# Altium PCB ALTAIR_PD_Sergeant_V26.2b_Reference.PcbDoc (part 1 of 4)
Units mm, origin at the board's own origin, x right, y up, seen from the top; angles counter-clockwise.
Board outline 74 x 56 mm, 4 copper layers (Top Layer, Layer 1, Layer 2, Bottom Layer), stack 1.675 mm thick; 187 components, 116 nets, 602 pads, 425 vias.
Unrouted connection lines stored in the file: 4.
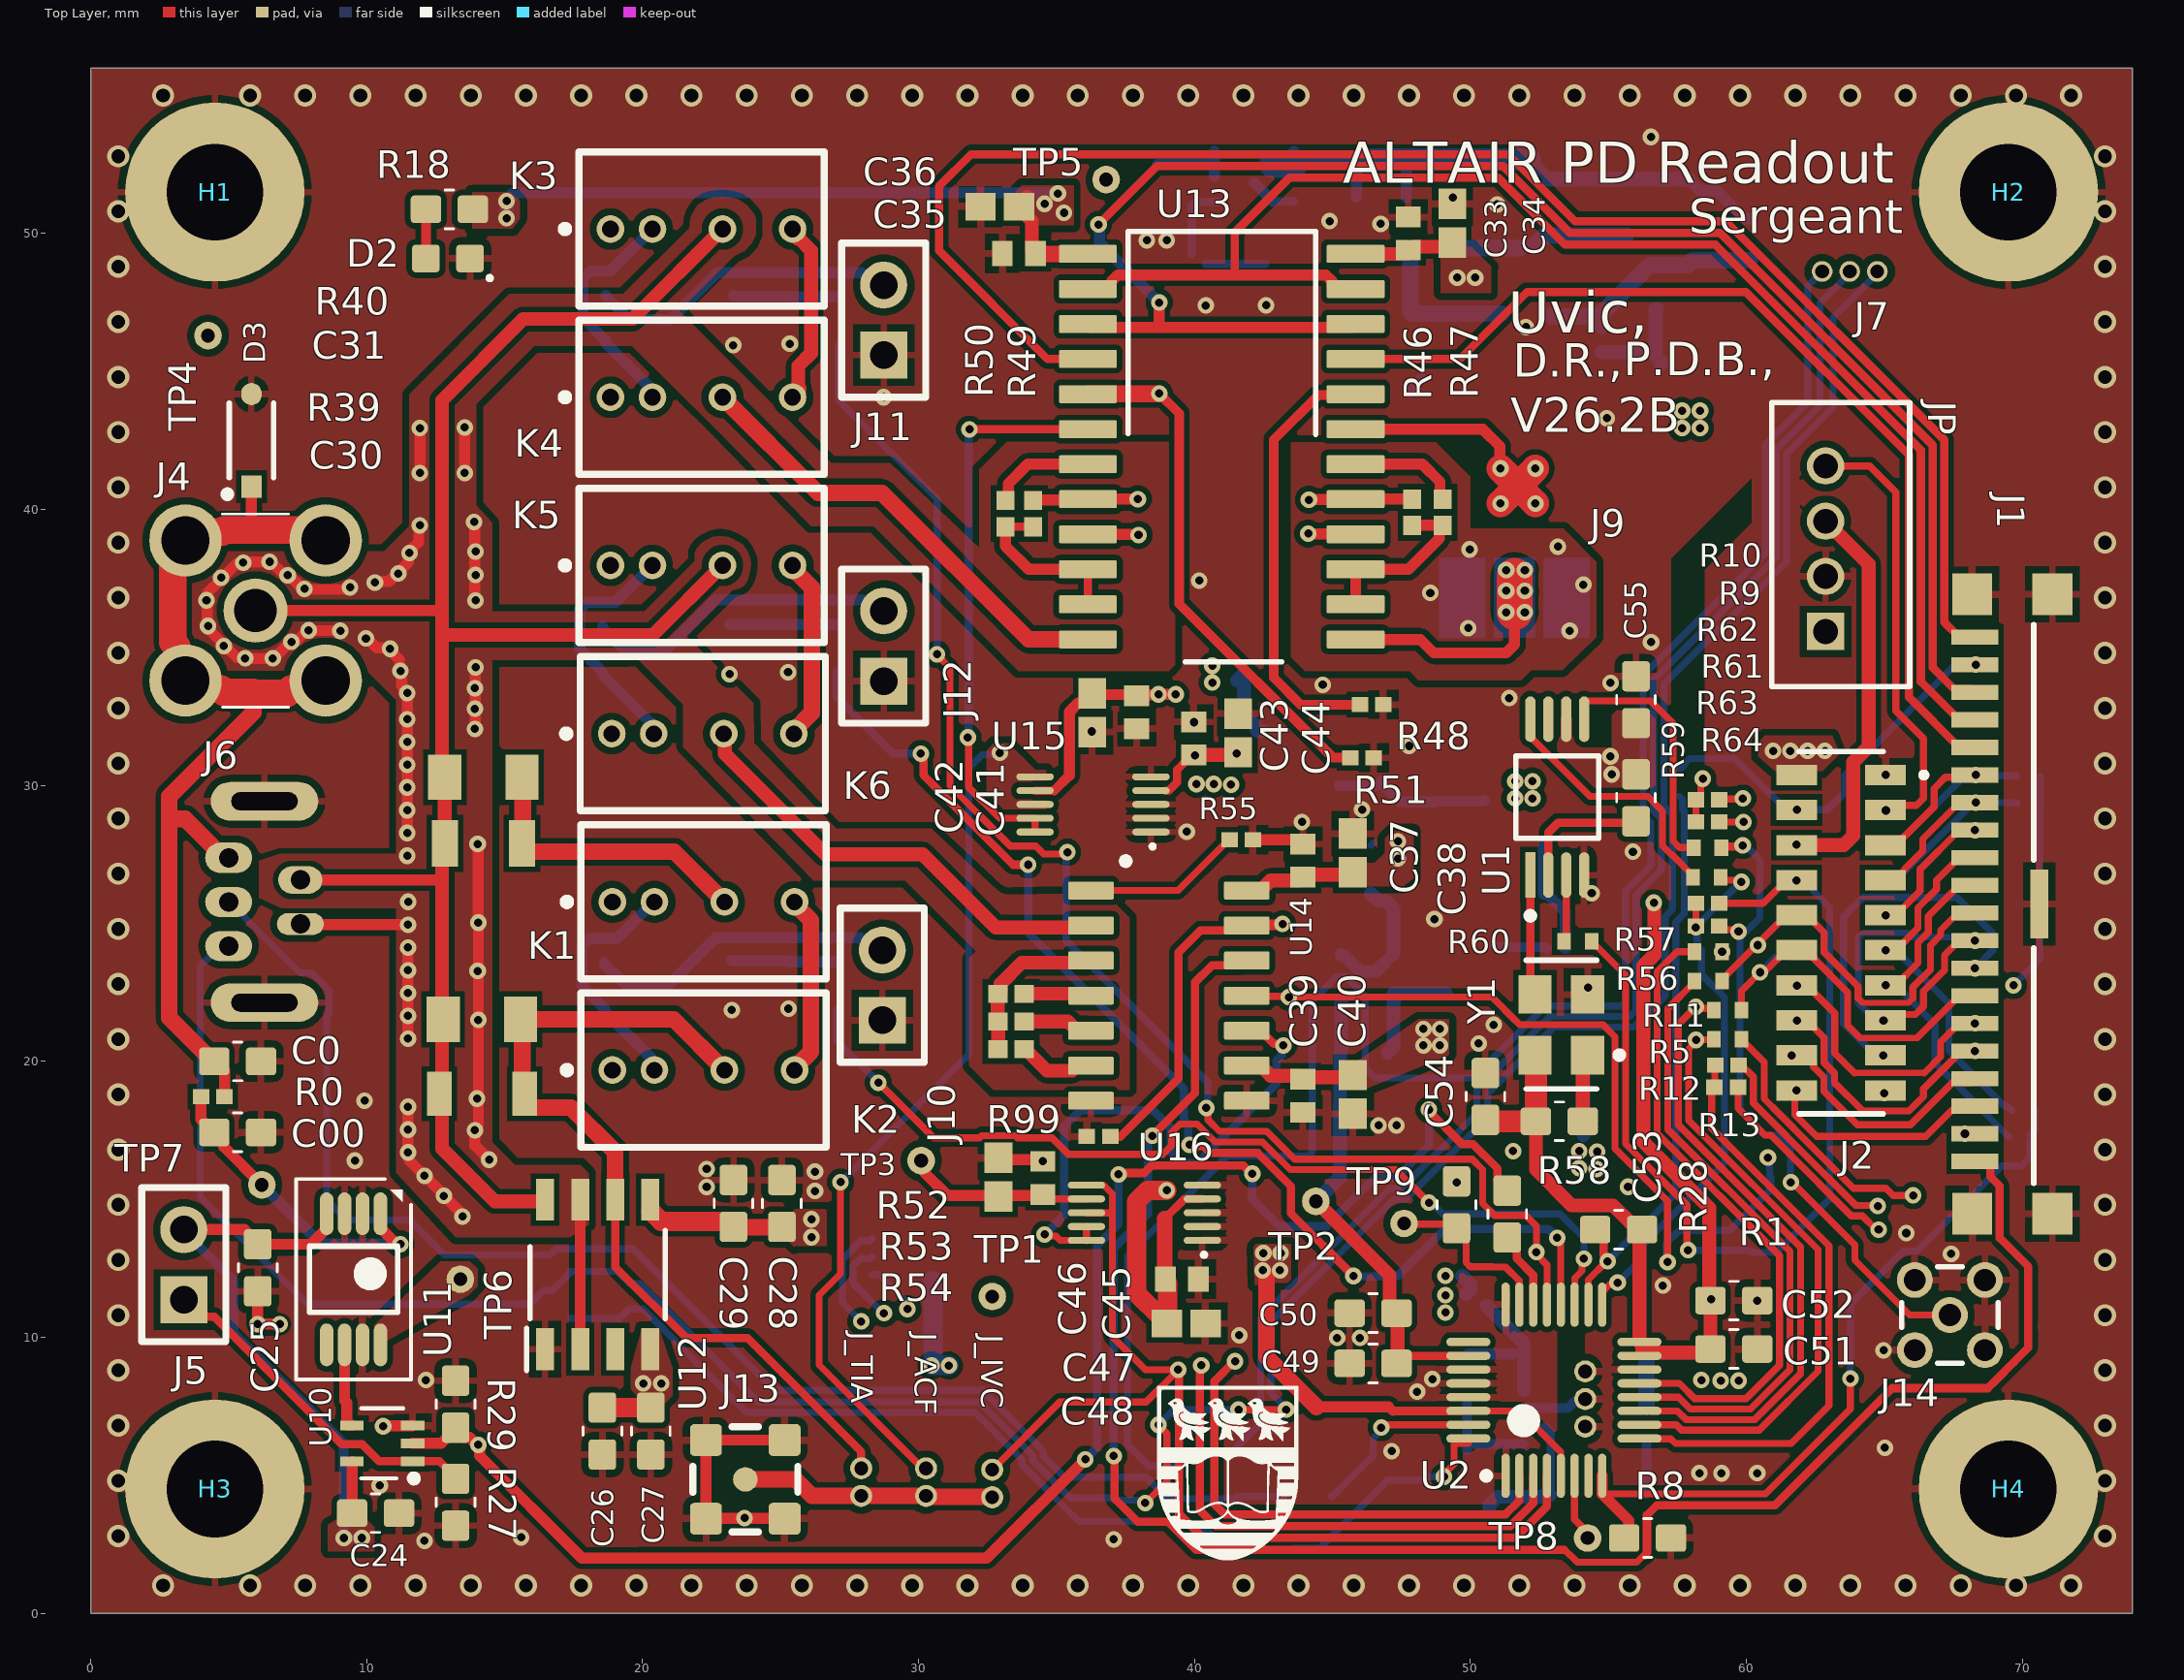
[diagram p0: Top Layer view]
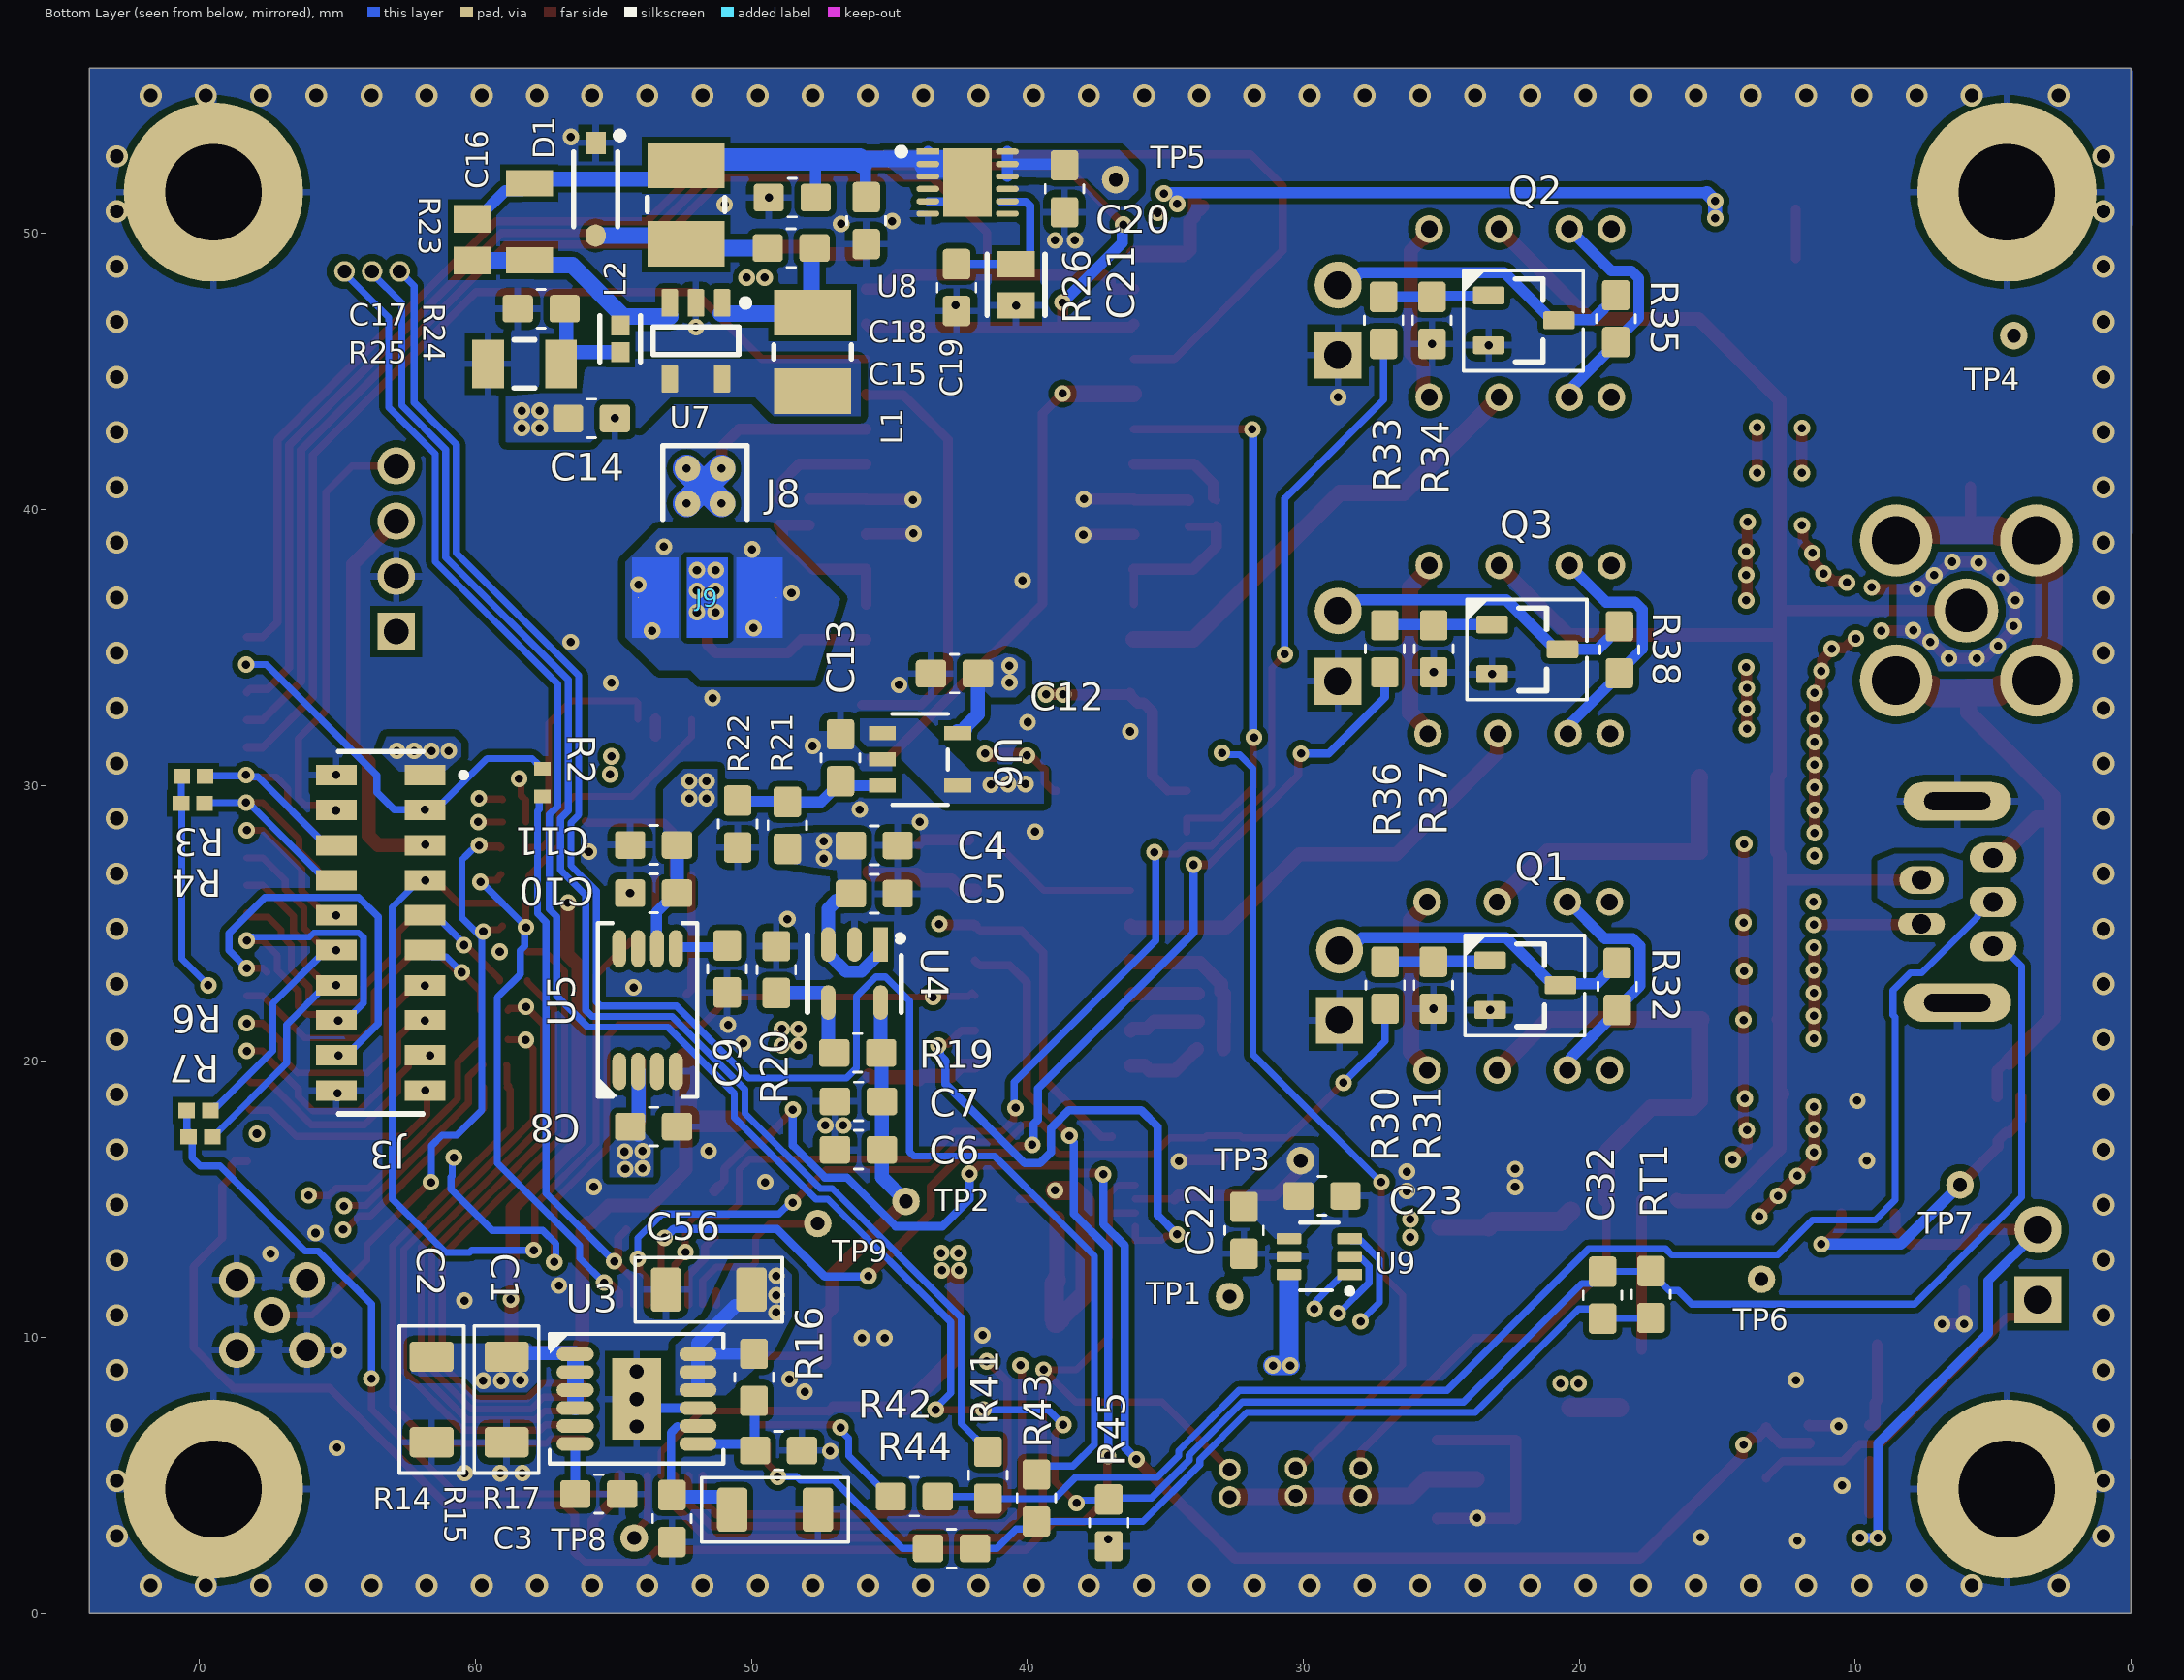
[diagram p1: Bottom Layer view, seen from below]
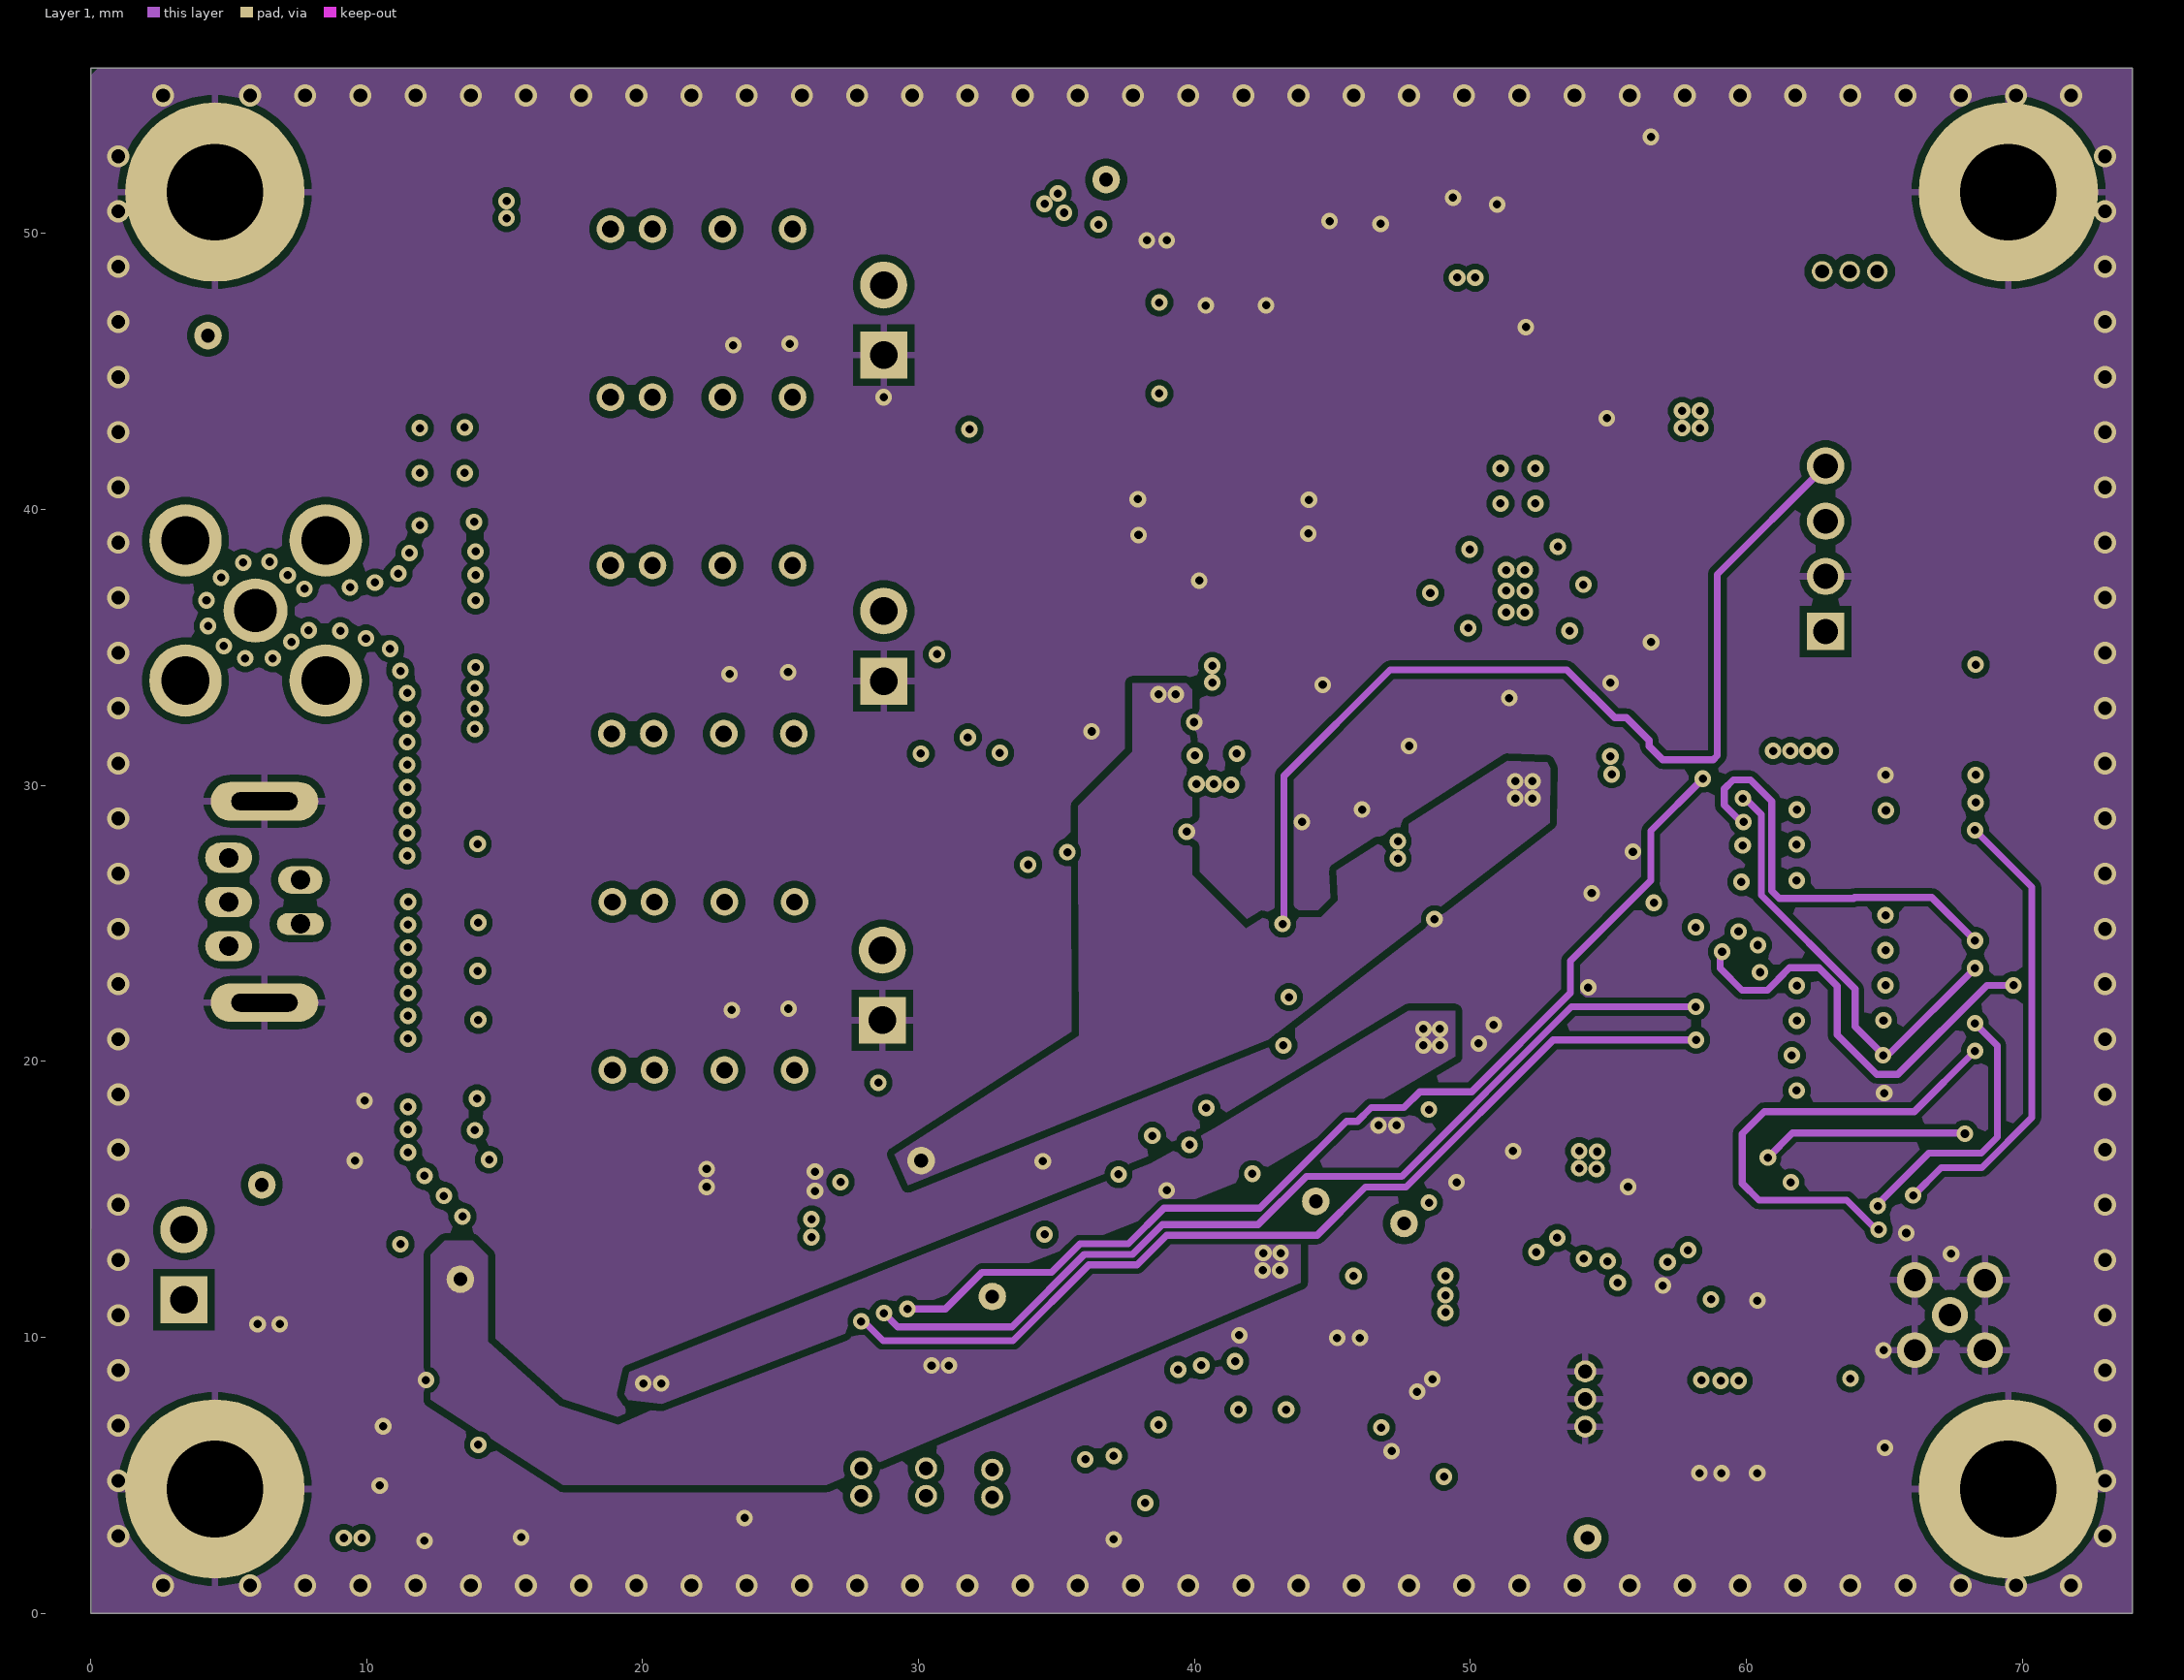
[diagram p2: Layer 1]
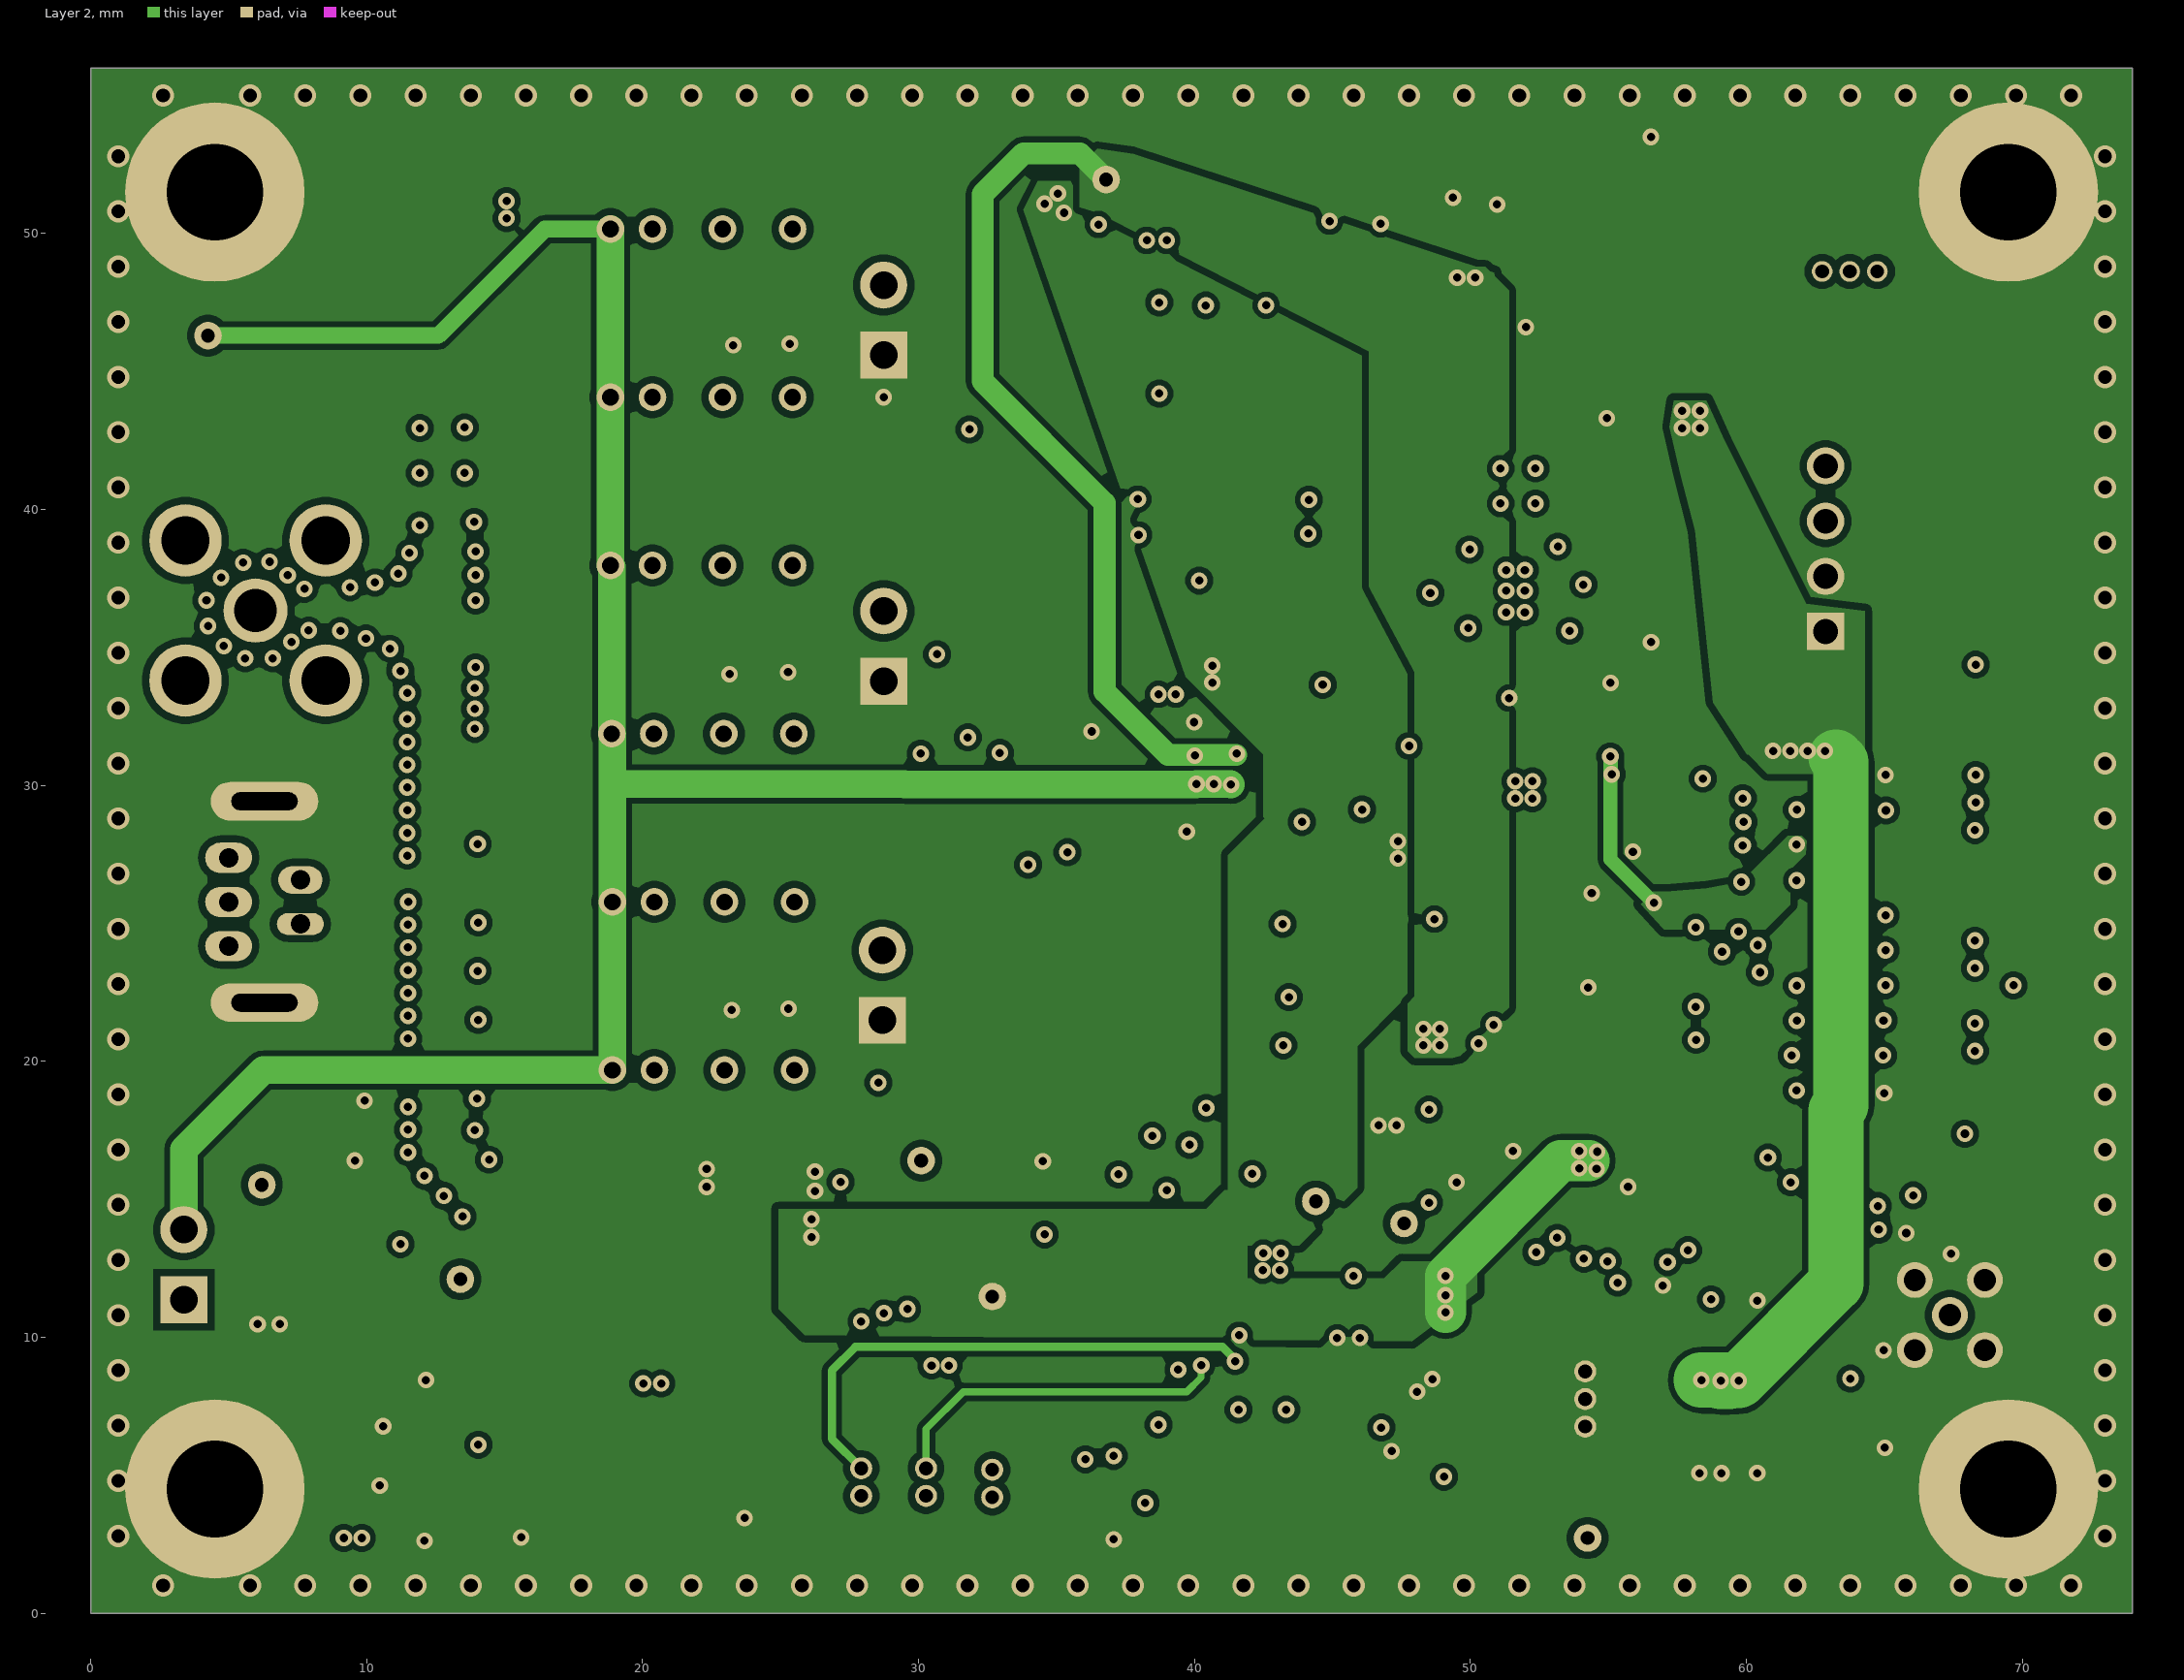
[diagram p3: Layer 2]
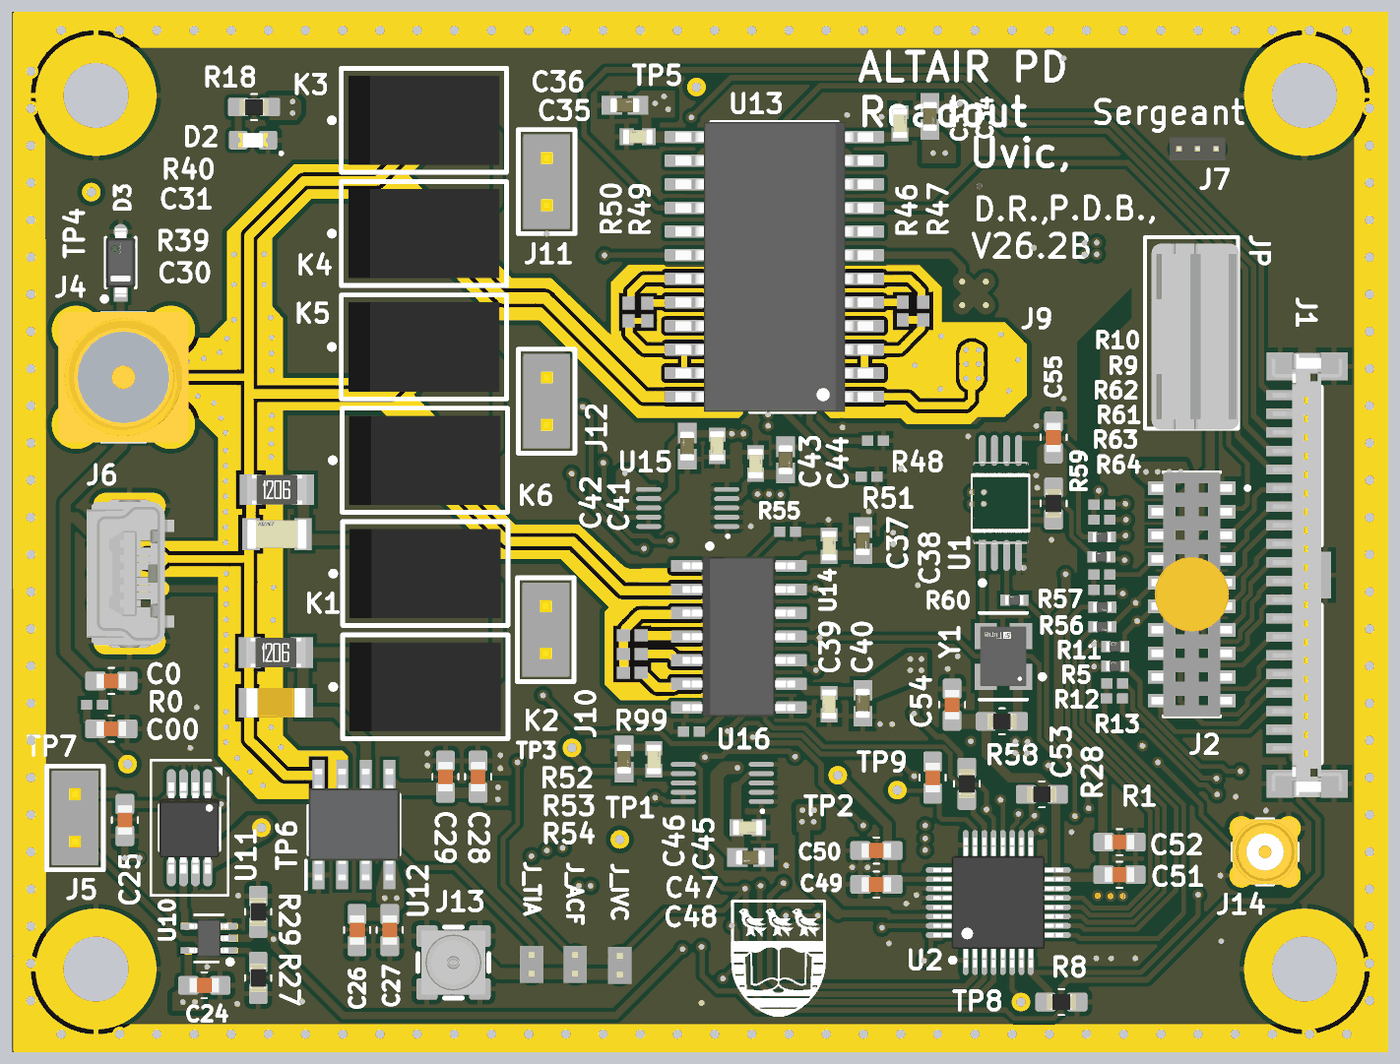
[diagram p6: 3D render of the assembled board from above, using the file's embedded part models]
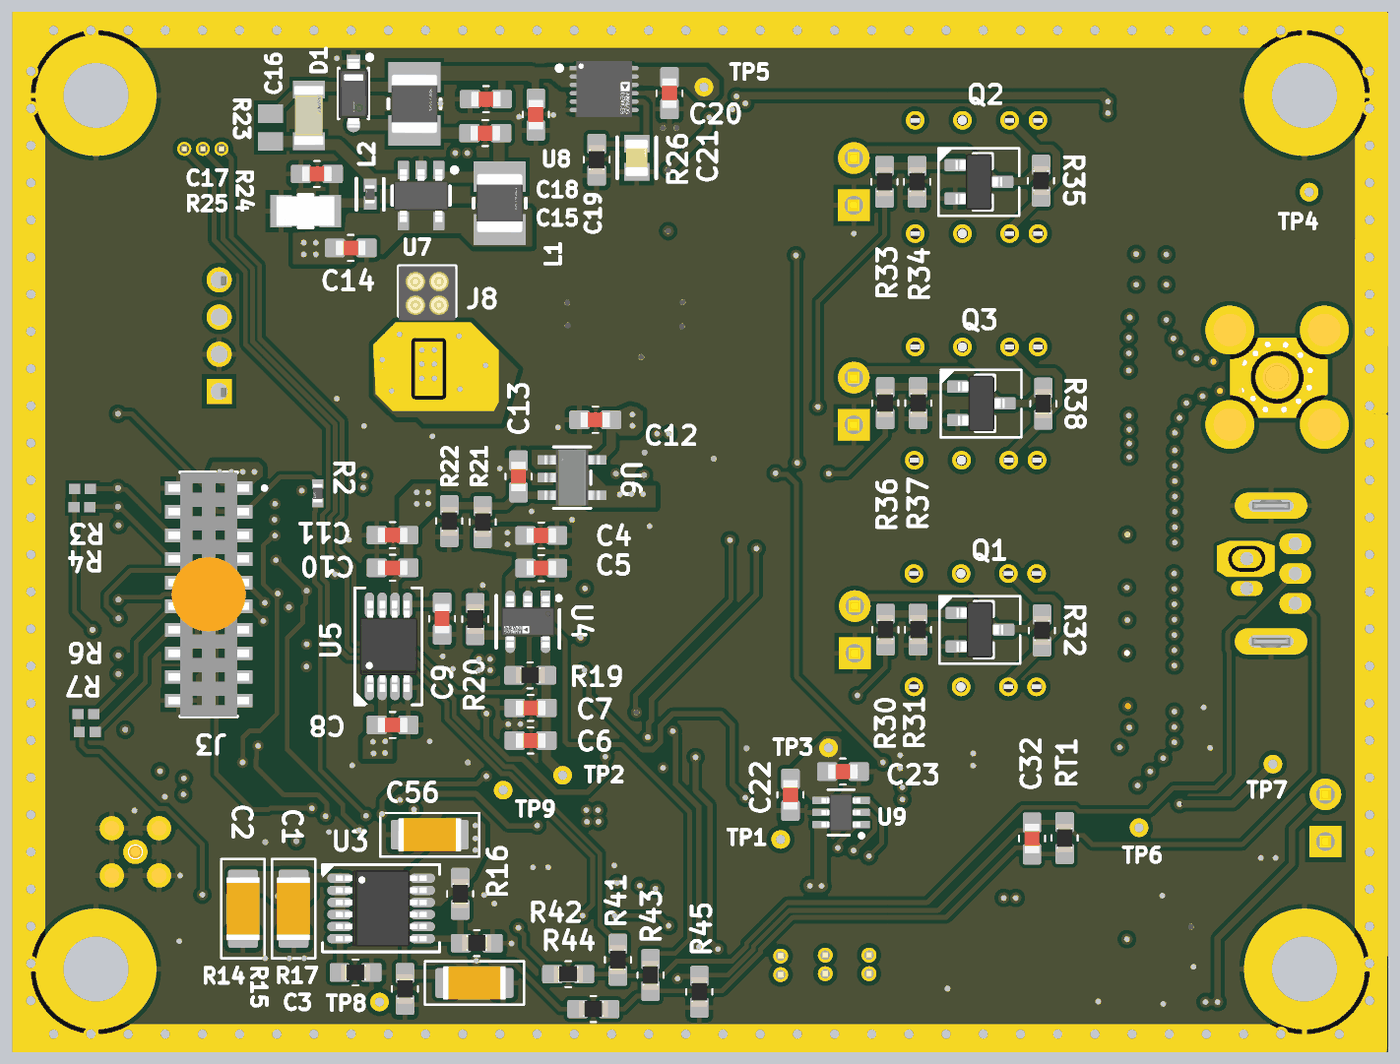
[diagram p7: 3D render of the assembled board from below, using the file's embedded part models]

## Layer stack, top to bottom
Top Solder: solder mask 0.0254, Solder Resist, Dk 3.5
Top Layer: signal copper 0.0356
Dielectric 2: prepreg 0.1702, FR-408, Dk 4.1
Layer 1: signal copper 0.035
Dielectric 1: core 1.1938, FR-408, Dk 4.8
Layer 2: signal copper 0.035
Dielectric 3: prepreg 0.1702, FR-408, Dk 4.1
Bottom Layer: signal copper 0.0356
Bottom Solder: solder mask 0.0254, Solder Resist, Dk 3.5

## Board outline
0,0 74,0 74,56 0,56

## Design rules (kind name [scope] priority, off if disabled: settings)
AssemblyTestPointUsage [All] p1: isadvanced=TRUE
AssemblyTestpoint [All] p1: isadvanced=TRUE testpointundercomponent=TRUE minsize=1.016 maxsize=2.54 preferedsize=1.524 minholesize=0 maxholesize=1.016 preferedholesize=0.813 testpointgrid=0.025 usegrid=TRUE gridtolerance=0 allowsidetop=TRUE allowsidebottom=TRUE
Clearance SoldierGuard [InNamedPolygon('SOLDIER_GUARD_L01_P001')] p1 off: isadvanced=TRUE gap=0.19 ignorepadtopadclearanceinfootprint=FALSE
Clearance UsbGuard [InNamedPolygon('GUARD_L01_P001') or InNamedPolygon('GUARD_L04_P001') or InNamedPolygon('GUARD_LBS_P001')] p2: isadvanced=TRUE gap=0.2 ignorepadtopadclearanceinfootprint=FALSE
Clearance Clearance_3 [InNamedPolygon('SYS_DVDD_L01_P001') or InNamedPolygon('SYS_DVDD_L03_P001')] p3 off: isadvanced=TRUE gap=0.25 ignorepadtopadclearanceinfootprint=FALSE
Clearance Clearance_1 [(ExistsOnLayer('Layer 1') Or ExistsOnLayer('Layer 2')) vs (ExistsOnLayer('Layer 1') Or ExistsOnLayer('Layer 2'))] p4: gap=0.2 ignorepadtopadclearanceinfootprint=TRUE except(0: Arc-Hole Track-Hole SMDPad-Hole THPad-Hole Via-Hole Fill-Hole Poly-Hole Region-Hole Text-Hole; 0.127: Arc-Arc Arc-Track Arc-SMDPad Arc-Text Track-Track Track-SMDPad Track-Text SMDPad-SMDPad SMDPad-Text Text-Text; 0.22: Arc-Via Track-Via Via-Text; 0.254: Arc-THPad Track-THPad SMDPad-THPad SMDPad-Via THPad-THPad THPad-Via THPad-Fill THPad-Poly THPad-Region THPad-Text Via-Via Fill-Fill Fill-Poly Fill-Region Poly-Poly Poly-Region Region-Region Hole-Hole) sourcerule=48 cellrowname=All cellrowtype=0 cellcolname=All cellcoltype=0 innerlayers=TRUE
Clearance Clearance_2 [(ExistsOnLayer('Top Layer') Or ExistsOnLayer('Bottom Layer')) vs (ExistsOnLayer('Top Layer') Or ExistsOnLayer('Bottom Layer'))] p5: gap=0.2 ignorepadtopadclearanceinfootprint=TRUE except(0: Arc-Hole Track-Hole SMDPad-Hole THPad-Hole Via-Hole Fill-Hole Poly-Hole Region-Hole Text-Hole; 0.127: Arc-Arc Arc-Track Arc-SMDPad Arc-Text Track-Track Track-SMDPad Track-Text SMDPad-SMDPad SMDPad-Text Text-Text; 0.22: Arc-Via Track-Via Via-Text; 0.254: Arc-THPad Track-THPad SMDPad-THPad SMDPad-Via THPad-THPad THPad-Via THPad-Fill THPad-Poly THPad-Region THPad-Text Via-Via Fill-Fill Fill-Poly Fill-Region Poly-Poly Poly-Region Region-Region Hole-Hole) sourcerule=48 cellrowname=All cellrowtype=0 cellcolname=All cellcoltype=0 outerlayers=TRUE
Clearance [All] p6: gap=0.254 ignorepadtopadclearanceinfootprint=TRUE ismatrix=TRUE
ComponentClearance [All] p1: isadvanced=TRUE gap=0.254 collisioncheckmode=3 verticalgap=0.254 showdistances=FALSE
FabricationTestPointUsage [All] p1: isadvanced=TRUE valid=0 allowmultiple=FALSE
FabricationTestpoint [All] p1: isadvanced=TRUE side=3 testpointundercomponent=TRUE minsize=1.016 maxsize=2.54 preferedsize=1.524 minholesize=0 maxholesize=1.016 preferedholesize=0.813 testpointgrid=0.025 allowsidetop=TRUE allowsidebottom=TRUE usegrid=TRUE gridtolerance=0
FanoutControl Fanout_BGA [IsBGA] p1: isadvanced=TRUE bgadir=Out bgaviamode=Centered fanoutstyle=Auto fanoutdirection=Alternating viagrid=0.025 // Fanout_BGA (Default Rule)
FanoutControl Fanout_LCC [IsLCC] p2: isadvanced=TRUE bgadir=Out bgaviamode=Centered fanoutstyle=Auto fanoutdirection=Alternating viagrid=0.025 // Fanout_LCC (Default Rule)
FanoutControl Fanout_SOIC [IsSOIC] p3: isadvanced=TRUE bgadir=Out bgaviamode=Centered fanoutstyle=Auto fanoutdirection=Alternating viagrid=0.025 // Fanout_SOIC (Default Rule)
FanoutControl Fanout_Small [(CompPinCount < 5)] p4: isadvanced=TRUE bgadir=Out bgaviamode=Centered fanoutstyle=Auto fanoutdirection=OutThenIn viagrid=0.025 // Fanout_Small (Default Rule)
FanoutControl Fanout_Default [All] p5: isadvanced=TRUE bgadir=Out bgaviamode=Centered fanoutstyle=Auto fanoutdirection=Alternating viagrid=0.025 // Fanout_Default (Default Rule)
Height [All] p1: isadvanced=TRUE minheight=0 maxheight=25.4 prefheight=12.7
HoleSize [All] p1: isadvanced=TRUE absolutevalues=TRUE maxlimit=4 minlimit=0.025 maxpercent=80.000 minpercent=20.000
HoleToHoleClearance [All] p1: isadvanced=TRUE gap=0.254 allowstackedmicrovias=TRUE
LayerPairs [All] p1: isadvanced=TRUE enforce=TRUE
MinimumSolderMaskSliver [All] p1: isadvanced=TRUE minsoldermaskwidth=0.076 // From PCBWay Advanced Capabilities
NetAntennae [All] p1: isadvanced=TRUE netantennaetolerance=0
PasteMaskExpansion [All] p1: isadvanced=TRUE expansion=0
PlaneClearance [All] p1: isadvanced=TRUE clearance=0.508
PlaneConnect [All] p1: isadvanced=TRUE planeconnectstyle=Relief reliefexpansion=0.508 reliefentries=4 reliefconductorwidth=0.254 reliefairgap=0.254
PolygonConnect PolygonConnectStyle_DCV [InPolygonClass('DirectConnectVias')] p1: isadvanced=TRUE thpad.connectstyle=Relief thpad.reliefconductorwidth=0.254 thpad.reliefentries=4 thpad.polygonreliefangle="90 Angle" thpad.airgapwidth=0.254 smdpad.connectstyle=Relief smdpad.reliefconductorwidth=0.254 smdpad.reliefentries=4 smdpad.polygonreliefangle="90 Angle" smdpad.airgapwidth=0.254 via.connectstyle=Direct via.reliefconductorwidth=0.254 via.reliefentries=2 via.polygonreliefangle="0 Angle" via.airgapwidth=0.254
PolygonConnect PolygonConnectStyle_DCE [InPolygonClass('DirectConnectEverything')] p2: isadvanced=TRUE connectstyle=Direct reliefconductorwidth=0.254 reliefentries=2 polygonreliefangle="0 Angle" airgapwidth=0.254
PolygonConnect [All] p3: connectstyle=Relief reliefconductorwidth=0.254 reliefentries=4 polygonreliefangle="90 Angle" airgapwidth=0.254
RoutingCorners [All] p1: isadvanced=TRUE cornerstyle=45-Degree minsetback=2.54 maxsetback=2.54
RoutingPriority [All] p1: isadvanced=TRUE routingpriority=0
RoutingVias RoutingViaStyle_3 [All] p1: isadvanced=TRUE holewidth=0.3 width=0.6 viastyle="Through Hole" minholewidth=0.3 minwidth=0.6 maxholewidth=0.711 maxwidth=1.27
RoutingVias [All] p2: holewidth=0.711 width=1.27 viastyle="Through Hole" minholewidth=0.711 minwidth=1.27 maxholewidth=0.711 maxwidth=1.27
ShortCircuit [All] p1: isadvanced=TRUE allowed=FALSE
SilkToSilkClearance [All] p1: isadvanced=TRUE silktosilkclearance=0.254
SilkToSolderMaskClearance [IsPad or IsPoly] p1: isadvanced=TRUE minsilkscreentomaskgap=0.15 clearancetoexposedcopper=TRUE
SolderMaskExpansion [All] p1: isadvanced=TRUE expansion=0 istentingtop=FALSE
SupplyNets "Schematic Supply Nets_5" [InNet('A5V')] p1: isadvanced=TRUE voltage=0.000
SupplyNets "Schematic Supply Nets_4" [InNet('-15V')] p2: isadvanced=TRUE voltage=0.000
SupplyNets "Schematic Supply Nets_3" [InNet('SYS_DVDD')] p3: isadvanced=TRUE voltage=0.000
SupplyNets "Schematic Supply Nets_2" [InNet('SYS_GND')] p4: isadvanced=TRUE voltage=0.000
SupplyNets "Schematic Supply Nets_1" [InNet('A5VSW')] p5: isadvanced=TRUE voltage=0.000
SupplyNets "Schematic Supply Nets" [InNet('7V5')] p6: isadvanced=TRUE voltage=0.000
UnRoutedNet [All] p1: isadvanced=TRUE
UnpouredPolygon [All] p1: isadvanced=TRUE
Width [All] p1: maxlimit=5 minlimit=0.127 preferedwidth=0.254 midlayer1_minwidth=0.254 midlayer2_minwidth=0.254 minimp=50.000000 maximp=50.000000 favimp=50.000000
4 further rules are at their usual default settings.

## Classes and differential pairs
polygon class DirectConnectVias: SYS_GND_L01_P001 SYS_GND_L01_P002 SYS_GND_L02_P001 SYS_GND_L04_P001
polygon class DirectConnectEverything: 7V5_L01_P001 7V5_L01_P002 7V5_L01_P003 7V5_L01_P004 7V5_L03_P001 7V5_L03_P002 7V5_L04_P001 7V5_L04_P002 7V5_L04_P003 7V5_L04_P004 -15V_L01_P001 -15V_L01_P002 -15V_L01_P003 -15V_L02_P001 -15V_L03_P001 -15V_L03_P002 -15V_L04_P001 -16V5_L04_P001 A5V_L02_P001 A5V_L04_P001 A5V_L04_P002 A5VSW_L01_P001 A5VSW_L04_P001 GUARD_L01_P001 GUARD_L01_P002 GUARD_L01_P003 GUARD_L01_P004 GUARD_L04_P001 GUARD_L04_P002 NetJ_ACF_1_L01_P001 SOLDIER_GUARD_L01_P001 SOLDIER_GUARD_L04_P001 SYS_DVDD_L01_P001 SYS_DVDD_L03_P001 SYS_GND_L03_P001 SYS_GND_L04_P002 SYS_VBAT_L01_P001 SYS_VBAT_L03_P001 SYS_VBAT_L04_P001 SYS_VBAT_L04_P002 SYS_VBAT_L04_P003 VBIAS_L01_P001 VBIAS_L01_P002 VBIAS_L02_P001
component class TIA1: C0 C00 C22 C23 C24 C25 C26 C27 C28 C29 C30 C31 C32 D3 J4 J5 J6 J7 J10 J11 J12 K1 K2 K3 K4 K5 K6 Q1 Q2 Q3 R0 R27 R28 R29 R30 R31 R32 R33 R34 R35 R36 R37 R38 R39 R40 R41 R42 R43 R44 R45 RT1 TP6 TP7 U9 U10 U11 U12
component class PWR1: C1 C2 C3 C4 C5 C6 C7 C8 C9 C10 C11 C12 C13 C14 C15 C16 C17 C18 C19 C20 C21 C56 D1 D2 L1 L2 R14 R15 R16 R17 R18 R19 R20 R21 R22 R23 R24 R25 R26 TP1 TP2 TP3 TP4 TP5 U3 U4 U5 U6 U7 U8
component class INT1: C33 C34 C35 C36 C37 C38 C39 C40 J8 J9 R46 R47 R48 R49 R50 R51 R52 R53 R54 R55 R99 U13 U14
component class BIO1: H1 H2 H3 H4 J1 J2 J3 JP R1 R2 R3 R4 R5 R6 R7 R8 R9 R10 R11 R12 R13
component class ADC1: C41 C42 C43 C44 C45 C46 C47 C48 C49 C50 C51 C52 C53 C54 C55 J13 J14 J_ACF J_IVC J_TIA R56 R57 R58 R59 R60 R61 R62 R63 R64 TP8 TP9 U1 U2 U15 U16 Y1

## Components (designator, comment, footprint, x,y, rotation, side; value= is the part's Value field where it differs from the comment)
C00 "TBD OPT" "CAP 0603 IPC MID DENSITY" 5.325,17.425 r180 top
C0 "TBD OPT" "CAP 0603 IPC MID DENSITY" 5.325,20 r180 top
C1 "10uF" "CAP 1206 IPC LOW DENSITY" 58.875,7.747 r90 bottom
C2 "10uF" "CAP 1206 IPC LOW DENSITY" 61.593,7.747 r90 bottom
C3 "10uF" "CAP 1206 IPC LOW DENSITY" 49.147,3.75 r0 bottom
C4 "1uF" "CAP 0603 IPC MID DENSITY" 45.55,27.826 r0 bottom
C5 "1uF" "CAP 0603 IPC MID DENSITY" 45.55,26.072 r0 bottom
C6 "1uF" "CAP 0603 IPC MID DENSITY" 46.125,16.794 r180 bottom
C7 "1uF" "CAP 0603 IPC MID DENSITY" 46.125,18.548 r180 bottom
C8 "1uF" "CAP 0603 IPC MID DENSITY" 53.55,17.632 r0 bottom
C9 "1uF" "CAP 0603 IPC MID DENSITY" 50.883,23.35 r90 bottom
C10 "10uF" "CAP 0603 IPC MID DENSITY" 53.55,26.09 r180 bottom
C11 "1uF" "CAP 0603 IPC MID DENSITY" 53.55,27.844 r180 bottom
C12 "1uF" "CAP 0603 IPC MID DENSITY" 42.645,34.05 r180 bottom
C13 "0.1uF" "CAP 0603 IPC MID DENSITY" 46.775,31 r270 bottom
C14 "10uF" "CAP 0603 IPC MID DENSITY" 55.8,43.296 r0 bottom
C15 "1uF" "CAP 0603 IPC MID DENSITY" 48.564,49.475 r0 bottom
C16 "330pF" "CAP 1206 NON-IPC KEMET NP0" 58.05,50.425 r270 bottom
C17 "1uF DNP" "CAP 0603 IPC MID DENSITY" 57.621,47.275 r0 bottom
C18 "10uF" "CAP 0603 IPC MID DENSITY" 48.525,51.3 r0 bottom
C19 "10uF" "CAP 0603 IPC MID DENSITY" 45.844,50.467 r270 bottom
C20 "10uF" "CAP 0603 IPC MID DENSITY" 38.656,51.621 r270 bottom
C21 "4.7uF" "CAP 0805 NON-IPC KEMET X5R" 40.415,48.142 r270 bottom
C22 "0.1uF" "CAP 0603 IPC MID DENSITY" 32.15,13.875 r90 bottom
C23 "10uF" "CAP 0603 IPC MID DENSITY" 29.325,15.125 r0 bottom
C24 "0.1uF" "CAP 0603 IPC MID DENSITY" 10.325,3.625 r180 top
C25 "1uF" "CAP 0603 IPC MID DENSITY" 6.055,12.519 r90 top
C26 "1uF" "CAP 0603 IPC MID DENSITY" 18.546,6.6 r90 top
C27 "0.1uF" "CAP 0603 IPC MID DENSITY" 20.3,6.6 r90 top
C28 "1uF" "CAP 0603 IPC MID DENSITY" 25.05,14.85 r270 top
C29 "0.1uF" "CAP 0603 IPC MID DENSITY" 23.296,14.85 r270 top
C30 "10pF" "CAP 1206 UNKNOWN" 14.182,18.826 r0 top
C31 "300pF" "CAP 1206 NON-IPC KEMET NP0" 14.232,27.896 r0 top
C32 "0.1uF" "CAP 0603 IPC MID DENSITY" 19.154,11.525 r270 bottom
C33 "0.1uF" "CAP 0603 NON-IPC KEMET X7R" 47.748,50 r270 top
C34 "10uF" "CAP 0603 IPC MID DENSITY MURATA" 49.355,50.375 r270 top
C35 "0.1uF" "CAP 0603 NON-IPC KEMET X7R" 33.639,49.275 r0 top
C36 "10uF" "CAP 0603 IPC MID DENSITY MURATA" 32.95,50.975 r0 top
C37 "0.1uF" "CAP 0603 NON-IPC KEMET X7R" 43.932,27.275 r270 top
C38 "10uF" "CAP 0603 IPC MID DENSITY MURATA" 45.74,27.55 r270 top
C39 "0.1uF" "CAP 0603 NON-IPC KEMET X7R" 43.932,18.75 r90 top
C40 "10uF" "CAP 0603 IPC MID DENSITY MURATA" 45.74,18.8 r90 top
C41 "0.1uF" "CAP 0603 NON-IPC KEMET X7R" 37.907,32.65 r90 top
C42 "10uF" "CAP 0603 IPC MID DENSITY MURATA" 36.3,32.632 r90 top
C43 "0.1uF" "CAP 0603 NON-IPC KEMET X7R" 39.979,31.7 r270 top
C44 "10uF" "CAP 0603 IPC MID DENSITY MURATA" 41.587,31.9 r270 top
C45 "0.1uF" "CAP 0603 NON-IPC KEMET X7R" 34.507,15.775 r270 top
C46 "10uF" "CAP 0603 IPC MID DENSITY MURATA" 32.9,15.8 r270 top
C47 "0.1uF" "CAP 0603 NON-IPC KEMET X7R" 39.55,12.107 r180 top
C48 "10uF" "CAP 0603 IPC MID DENSITY MURATA" 39.7,10.5 r180 top
C49 "0.1uF" "CAP 0603 IPC MID DENSITY" 46.475,9.05 r0 top
C50 "10uF" "CAP 0603 IPC MID DENSITY" 46.475,10.875 r0 top
C51 "0.1uF" "CAP 0603 IPC MID DENSITY" 59.55,9.575 r180 top
C52 "10uF" "CAP 0603 IPC MID DENSITY" 59.55,11.329 r180 top
C53 "10uF" "CAP 0603 IPC MID DENSITY" 49.5,14.8 r270 top
C54 "0.1uF" "CAP 0603 IPC MID DENSITY" 50.546,18.725 r270 top
C55 "0.1uF" "CAP 0603 IPC MID DENSITY" 56.004,33.104 r270 top
C56 "10uF" "CAP 1206 IPC LOW DENSITY" 51.55,11.725 r180 bottom
D1 "MBR0520" "SOD-123 ONSEMI SMALL PADS" 55.65,51.605 r270 bottom
D2 "BLUE" "LED 0603 MID DENSITY" 12.95,49.096 r0 top
D3 "MMSZ4679" "SOD-123 ONSEMI SMALL PADS" 5.825,42.5 r90 top
H1 "Mount-hole" "M3 PTH FOR 4.5MM HEX" 4.5,51.5 r0 top
H2 "Mount-hole" "M3 PTH FOR 4.5MM HEX" 69.5,51.5 r0 top
H3 "Mount-hole" "M3 PTH FOR 4.5MM HEX" 4.5,4.5 r0 top
H4 "Mount-hole" "M3 PTH FOR 4.5MM HEX" 69.5,4.5 r0 top
J1 "DF19-20P-1V_52_" "HEADER MALE 20x1 1MM PITCH SMD" 69.641,25.7 r270 top
J2 "CLP-110-02-X-D" "HEADER FEMALE 10X2 1.27MM PITCH SMD" 63.437,24.66 r90 top
J3 "CLP-110-02-X-D" "HEADER FEMALE 10X2 1.27MM PITCH SMD" 63.437,24.66 r90 bottom
J4 "60312002114503" "COAX SMA THT" 5.975,36.336 r180 top
J5 "Jumper" "JUMPER 2POS 2.54MM PITCH THT" 3.375,11.36 r90 top
J6 "USB-miniB" USB-miniB 6.3,25.775 r90 top
J7 "BC020-03-A-0200-0300-L-G" "JUMPER 3POS 1MM PITCH THT" 63.75,48.625 r0 top
J8 "Pogo_pins" "POGO PINS 2x2 SMD 50mil pitch" 51.685,40.85 r270 bottom
J9 "Pogo_Pad" "POGO_PAD 3 x 1x2" 51.6,36.8 r0 top
J10 "Jumper" "JUMPER 2POS 2.54MM PITCH THT" 28.688,21.487 r90 top
J11 "Jumper" "JUMPER 2POS 2.54MM PITCH THT" 28.74,45.591 r90 top
J12 "Jumper" "JUMPER 2POS 2.54MM PITCH THT" 28.74,33.78 r90 top
J13 "MMCX" "COAX MMCX SMD" 23.725,4.85 r0 top
J14 "66012002111503" "COAX MMCX THT" 67.38,10.805 r270 top
J_ACF "J_TIA" "JUMPER 2POS 1MM PITCH THT" 30.275,5.25 r270 top
J_IVC "J_TIA" "JUMPER 2POS 1MM PITCH THT" 32.675,5.2 r270 top
J_TIA "J_TIA" "JUMPER 2POS 1MM PITCH THT" 27.925,5.25 r270 top
JP "440054-4" "HEADER MALE 4x1 2MM PITCH THT" 62.875,35.575 r270 top
K1 "118-A-5/2D" 118-A-5/2D 18.909,25.778 r0 top
K2 "118-A-5/2D" 118-A-5/2D 18.909,19.682 r0 top
K3 "118-A-5/2D" 118-A-5/2D 18.838,50.163 r0 top
K4 "118-A-5/2D" 118-A-5/2D 18.838,44.067 r0 top
K5 "118-A-5/2D" 118-A-5/2D 18.838,37.971 r0 top
K6 "118-A-5/2D" 118-A-5/2D 18.885,31.874 r0 top
L1 "10uH" "IND 1210 IPC LOW DENSITY" 47.784,45.707 r90 bottom
L2 "10uH" "IND 1210 IPC LOW DENSITY" 52.372,51.05 r90 bottom
Q1 "DMG2302UK" "SOT90-3 LOW DENSITY" 21.957,22.757 r180 bottom
Q2 "DMG2302UK" "SOT90-3 LOW DENSITY" 22.009,46.853 r180 bottom
Q3 "DMG2302UK" "SOT90-3 LOW DENSITY" 21.882,34.931 r180 bottom
R0 "TBD" "RES 0402 IPC MID DENSITY" 4.425,18.721 r0 top
R1 "10k" "RES 0603 IPC MID DENSITY" 55.375,13.9 r180 top
R2 "47R" "RES 0402 NON-IPC SEI" 57.575,30.1 r270 bottom
R3 "0R OPT" "RES 0402 IPC MID DENSITY" 70.225,30.325 r0 bottom
R4 "0R OPT" "RES 0402 IPC MID DENSITY" 70.25,29.35 r0 bottom
R5 "47R" "RES 0402 NON-IPC SEI" 59.325,20.796 r180 top
R6 "TBD OPT" "RES 0402 IPC MID DENSITY" 70.043,18.218 r0 bottom
R7 "TBD OPT" "RES 0402 IPC MID DENSITY" 69.971,17.257 r0 bottom
R8 "0R DNP" "RES 0603 IPC MID DENSITY" 56.425,2.725 r0 top
R9 "TBD OPT" "RES 0402 IPC MID DENSITY" 58.6,28.675 r180 top
R10 "TBD OPT" "RES 0402 IPC MID DENSITY" 58.6,29.479 r180 top
R11 "47R" "RES 0402 NON-IPC SEI" 59.325,21.85 r180 top
R12 "TBD OPT" "RES 0402 IPC MID DENSITY" 59.3,19.866 r180 top
R13 "TBD OPT" "RES 0402 IPC MID DENSITY" 59.275,19.062 r180 top
R14 "TBD" "RES 0603 IPC MID DENSITY" 55.536,4.318 r0 bottom
R15 "75k" "RES 0603 IPC MID DENSITY" 52.882,3.429 r90 bottom
R16 "150k" "RES 0603 IPC MID DENSITY" 49.909,8.548 r90 bottom
R17 "10k" "RES 0603 IPC MID DENSITY" 49.02,5.894 r0 bottom
R18 "330R" "RES 0603 IPC MID DENSITY" 13,50.875 r0 top
R19 "TBD" "RES 0603 IPC MID DENSITY" 46.15,20.302 r180 bottom
R20 "TBD" "RES 0603 IPC MID DENSITY" 49.1,23.325 r270 bottom
R21 "100k" "RES 0603 IPC MID DENSITY" 48.7,28.55 r270 bottom
R22 "200k" "RES 0603 IPC MID DENSITY" 50.5,28.6 r90 bottom
R23 "30k" "RES 0805 IPC HIGH DENSITY" 60.125,49.775 r90 bottom
R24 "1k" "RES 0402 IPC LOW DENSITY YAGEO" 54.757,46.182 r90 bottom
R25 "1.5k" "RES 1206 NON-IPC VISHAY" 58.225,45.275 r180 bottom
R26 "150k" "RES 0603 IPC MID DENSITY" 42.569,48.042 r270 bottom
R27 "100k" "RES 0603 IPC MID DENSITY" 13.225,4.021 r270 top
R28 "47R" "RES 0603 IPC MID DENSITY" 51.339,14.464 r270 top
R29 "100k" "RES 0603 IPC MID DENSITY" 13.225,7.575 r90 top
R30 "47R" "RES 0603 IPC MID DENSITY" 27.04,22.757 r270 bottom
R31 "100k" "RES 0603 IPC MID DENSITY" 25.286,22.757 r270 bottom
R32 "0R" "RES 0603 IPC MID DENSITY" 18.622,22.714 r270 bottom
R33 "47R" "RES 0603 IPC MID DENSITY" 27.092,46.853 r270 bottom
R34 "100k" "RES 0603 IPC MID DENSITY" 25.338,46.853 r270 bottom
R35 "0R" "RES 0603 IPC MID DENSITY" 18.672,46.914 r270 bottom
R36 "47R" "RES 0603 IPC MID DENSITY" 27.05,34.95 r270 bottom
R37 "100k" "RES 0603 IPC MID DENSITY" 25.275,34.95 r270 bottom
R38 "0R" "RES 0603 IPC MID DENSITY" 18.547,34.914 r270 bottom
R39 "1M" "RES 1206 IPC MID DENSITY" 14.175,21.525 r0 top
R40 "10k" "RES 1206 IPC MID DENSITY" 14.232,30.295 r0 top
R41 "0R OPT" "RES 0603 IPC MID DENSITY" 41.429,5 r90 bottom
R42 "0R OPT" "RES 0603 IPC MID DENSITY" 44.1,4.225 r180 bottom
R43 "0R OPT" "RES 0603 IPC MID DENSITY" 39.675,4.175 r90 bottom
R44 "0R OPT" "RES 0603 IPC MID DENSITY" 42.75,2.346 r180 bottom
R45 "0R" "RES 0603 IPC MID DENSITY" 37.05,3.275 r270 bottom
R46 "TBD DNP" "RES 0402 IPC LOW DENSITY" 47.9,39.9 r270 top
R47 "CAP DNP" "RES 0402 IPC LOW DENSITY" 49,39.9 r270 top
R48 "0R" "RES 0402 IPC MID DENSITY" 46.425,32.925 r0 top
R49 "TBD DNP" "RES 0402 IPC LOW DENSITY" 34.154,39.85 r270 top
R50 "CAP DNP" "RES 0402 IPC LOW DENSITY" 33.15,39.85 r270 top
R51 "0R" "RES 0402 IPC MID DENSITY" 46.075,31 r0 top
R52 "CAP OPT" "RES 0402 IPC LOW DENSITY" 33.35,22.45 r0 top
R53 "CAP OPT" "RES 0402 IPC LOW DENSITY" 33.35,21.446 r0 top
R54 "CAP OPT" "RES 0402 IPC LOW DENSITY" 33.35,20.441 r0 top
R55 "0R" "RES 0402 IPC MID DENSITY" 41.7,28.035 r0 top
R56 "47R" "RES 0402 NON-IPC SEI" 58.625,22.916 r0 top
R57 "47R" "RES 0402 NON-IPC SEI" 58.625,23.971 r0 top
R58 "10k" "RES 0603 IPC MID DENSITY" 53.225,17.825 r180 top
R59 "10k" "RES 0603 IPC MID DENSITY" 56.004,29.55 r90 top
R60 "33R" "RES 0402 NON-IPC YAGEO" 53.9,24.35 r180 top
R61 "33R" "RES 0402 NON-IPC YAGEO" 58.575,26.675 r180 top
R62 "33R" "RES 0402 NON-IPC YAGEO" 58.6,27.746 r180 top
R63 "0R A, C" "RES 0402 IPC MID DENSITY" 58.6,25.725 r0 top
R64 "0R A, B" "RES 0402 IPC MID DENSITY" 58.6,24.9 r180 top
R99 "0R" "RES 0402 IPC MID DENSITY" 36.525,17.275 r0 top
RT1 "NTC 0603 10K 1%" "RES 0603 IPC MID DENSITY" 17.4,11.55 r270 bottom value="NT 10K"
TP1 "Testpoint" "TESTPOINT THT" 32.675,11.475 r90 top
TP2 "Testpoint" "TESTPOINT THT" 44.4,14.925 r90 top
TP3 "Testpoint" "TESTPOINT THT" 30.1,16.4 r90 top
TP4 "Testpoint" "TESTPOINT THT" 4.25,46.3 r90 top
TP5 "Testpoint" "TESTPOINT THT" 36.8,51.95 r90 top
TP6 "Testpoint" "TESTPOINT THT" 13.4,12.105 r180 top
TP7 "Testpoint" "TESTPOINT THT" 6.2,15.525 r90 top
TP8 "Testpoint" "TESTPOINT THT" 54.25,2.725 r0 top
TP9 "Testpoint" "TESTPOINT THT" 47.6,14.125 r90 top
U1 "LMK1C1103PWR" "8-TSSOP 0.65MM PITCH 4.4MM WIDTH IPC MID DENSITY" 53.15,29.575 r90 top
U2 "ADS124S08IPBSR" "32TQFP 7X7MM IPC LOW DENSITY" 53.029,8.079 r90 top
U3 "LT3045" "12-TSOP 0.65MM PITCH 3MM WIDTH EP IPC MID DENSITY" 54.164,7.761 r180 bottom
U4 "ADP7142AUJZ-5.0-R7" "SOT23-5 HIGH DENSITY AD" 46.269,23.184 r270 bottom
U5 "REF5050" "8-TSOP 0.65MM PITCH 3MM WIDTH IPC MID DENSITY" 53.766,21.861 r90 bottom
U6 "OPA182" "SOT23-5 NON-IPC TI" 43.891,30.939 r180 bottom
U7 "LM2611AMF/NOPB" "SOT23-5 MID DENSITY" 52.016,46.11 r270 bottom
U8 "LT3094EDD#PBF" "12DFN 3x3MM EP IPC MID DENSITY" 42.169,51.842 r180 bottom
U9 "DAC5311" "SOT363-6 MID DENSITY" 29.425,12.925 r0 bottom
U10 "SN74LVC1G32DCKR" "SOT353-5 NON-IPC CUSTOM" 10.57,6.153 r180 top
U11 "ADG1419BRMZ-REEL7" "8-TSOP 0.65MM PITCH 3MM WIDTH IPC LOW DENSITY" 9.527,12.1 r270 top
U12 "OPA928DR" "8-SOIC 4MM WIDE MID DENSITY" 18.375,12.275 r90 top
U13 "ACF2101BU" "24-SOIC 7.6MM WIDE LOW DENSITY" 40.993,42.275 r180 top
U14 "IVC102/SO" "14-SOIC 4MM WIDE LOW DENSITY" 39.075,22.381 r0 top
U15 "LT1991IMS#TRPBF" "10-SOP 0.5MM PITCH 3MM WIDTH IPC HIGH DENSITY" 36.325,29.31 r180 top
U16 "LT1991IMS#TRPBF" "10-SOP 0.5MM PITCH 3MM WIDTH IPC HIGH DENSITY" 38.188,14.512 r180 top
Y1 "SIT1602Bx" "4PQFN NON-IPC SITIME" 53.3,21.325 r180 top

## Footprints (in the part's own frame and the unit in brackets; to place one, negate y for a bottom-side part, rotate by r counter-clockwise, add the part's x,y. Pads: shape width x height; smd on the part's side, far side on the other; paste and mask are expansions set on the pad)
"4PQFN NON-IPC SITIME" [mm] "FP-SiT1602-2-MFG"
  rect 1.2x1.4 smd paste+0 mask+0: 1(-0.95,1.1) 2(-0.95,-1.1) 3(0.95,-1.1) 4(0.95,1.1)
  silkscreen extent -2.23,-2.34 1.28,2.32, body extent -1.65,-1.9 1.65,1.9, height 0.25
"8-SOIC 4MM WIDE MID DENSITY" [mm]
  rect 1.525x0.65 smd: 1(-2.712,1.905) 2(-2.712,0.635) 3(-2.712,-0.635) 4(-2.712,-1.905) 5(2.712,-1.905) 6(2.712,-0.635) 7(2.712,0.635) 8(2.712,1.905)
  silkscreen extent -3.47,-2.45 1.6,2.58, body extent -3,-2.45 3,2.45, height 1.75
"8-TSOP 0.65MM PITCH 3MM WIDTH IPC LOW DENSITY" [mm] "TSOP65P490X110-8M"
  oval 1.55x0.48 smd mask-0.05: 1(-2.375,0.975) 2(-2.375,0.325) 3(-2.375,-0.325) 4(-2.375,-0.975) 5(2.375,-0.975) 6(2.375,-0.325) 7(2.375,0.325) 8(2.375,0.975)
  silkscreen extent -3.63,-2.08 3.63,2.08, body extent -2.45,-1.6 2.45,1.6, height 1.1
"8-TSOP 0.65MM PITCH 3MM WIDTH IPC MID DENSITY" [mm] "TSOP65P490X110-8N"
  oval 1.35x0.5 smd mask-0.02: 1(-2.225,1.025) 2(-2.225,0.345) 3(-2.225,-0.345) 4(-2.225,-1.025) 5(2.225,-1.025) 6(2.225,-0.345) 7(2.225,0.345) 8(2.225,1.025)
  silkscreen extent -3.15,-1.8 3.15,1.8, body extent -2.45,-1.55 2.45,1.55, height 1.1
"8-TSSOP 0.65MM PITCH 4.4MM WIDTH IPC MID DENSITY" [mm] "FP-PW0008A-IPC_B, Texas Instruments branding"
  rect 1.655x0.381 smd paste+0 mask+0: 1(-2.825,0.975)
  rrect100% 1.655x0.381 smd paste+0 mask+0: 2(-2.825,0.325) 3(-2.825,-0.325) 4(-2.825,-0.975) 5(2.825,-0.975) 6(2.825,-0.325) 7(2.825,0.325) 8(2.825,0.975)
  silkscreen extent -4.42,-1.5 1.5,1.5, body extent -3.9,-1.75 3.9,1.75, height 0.25
"10-SOP 0.5MM PITCH 3MM WIDTH IPC HIGH DENSITY" [mm] "SOP, 10-Leads, Body 3x3mm, Pitch 0.50mm, IPC High Density"
  oval 1.35x0.25 smd: 1(-2.1,1) 2(-2.1,0.5) 3(-2.1,0) 4(-2.1,-0.5) 5(-2.1,-1) 6(2.1,-1) 7(2.1,-0.5) 8(2.1,0) 9(2.1,0.5) 10(2.1,1)
  silkscreen extent -2.23,1.45 -2.08,1.6, body extent -1.55,-1.55 1.55,1.55, height 1.1
"12-TSOP 0.65MM PITCH 3MM WIDTH EP IPC MID DENSITY" [mm] "TSOP65P490X110_HS-13N"
  oval 1.35x0.5 smd mask-0.03: 1(-2.225,1.625) 2(-2.225,0.975) 3(-2.225,0.325) 4(-2.225,-0.325) 5(-2.225,-0.975) 6(-2.225,-1.625) 7(2.225,-1.625) 8(2.225,-0.975) 9(2.225,-0.325) 10(2.225,0.325) 11(2.225,0.975) 12(2.225,1.625)
  round 0.8 hole 0.5 mask-0.03: 13(0,-1) 13(0,0) 13(0,1)
  rect 1.76x2.95 smd: 13(0,0)
  silkscreen extent -3.15,-2.34 3.15,2.38, body extent -2.45,-2.05 2.45,2.05, height 1.1
"12DFN 3x3MM EP IPC MID DENSITY" [mm] "Exposed pad, Analog Devices logo"
  rect 0.831x0.222 smd paste+0 mask+0: 1(-1.441,1.125)
  rrect100% 0.831x0.222 smd paste+0 mask+0: 2(-1.441,0.675) 3(-1.441,0.225) 4(-1.441,-0.225) 5(-1.441,-0.675) 6(-1.441,-1.125) 7(1.441,-1.125) 8(1.441,-0.675) 9(1.441,-0.225) 10(1.441,0.225) 11(1.441,0.675) 12(1.441,1.125)
  rect 1.75x2.48 smd paste-1000 mask-0.05: 13(0,0)
  silkscreen extent -2.53,1 -2.28,1.25, body extent -1.5,-1.5 1.5,1.5, height 0.8
"14-SOIC 4MM WIDE LOW DENSITY" [mm]
  rrect15% 1.65x0.65 smd: 1(-2.825,3.81) 2(-2.825,2.54) 3(-2.825,1.27) 4(-2.825,0) 5(-2.825,-1.27) 6(-2.825,-2.54) 7(-2.825,-3.81) 8(2.825,-3.81) 9(2.825,-2.54) 10(2.825,-1.27) 11(2.825,0) 12(2.825,1.27) 13(2.825,2.54) 14(2.825,3.81)
  silkscreen extent -1.69,4.75 -1.44,5, body extent -3.02,-4.32 3.02,4.32, height 1.59
"24-SOIC 7.6MM WIDE LOW DENSITY" [mm] "SOIC, 24-Leads, Body 15.6x7.6mm, Pitch 1.27mm, IPC Low Density"
  rrect15% 2.1x0.65 smd: 1(-4.85,6.985) 2(-4.85,5.715) 3(-4.85,4.445) 4(-4.85,3.175) 5(-4.85,1.905) 6(-4.85,0.635) 7(-4.85,-0.635) 8(-4.85,-1.905) 9(-4.85,-3.175) 10(-4.85,-4.445) 11(-4.85,-5.715) 12(-4.85,-6.985) 13(4.85,-6.985) 14(4.85,-5.715) 15(4.85,-4.445) 16(4.85,-3.175) 17(4.85,-1.905) 18(4.85,-0.635) 19(4.85,0.635) 20(4.85,1.905) 21(4.85,3.175) 22(4.85,4.445) 23(4.85,5.715) 24(4.85,6.985)
  silkscreen extent -3.4,-7.8 3.4,7.8, body extent -5.32,-7.8 5.33,7.8, height 2.71
"32TQFP 7X7MM IPC LOW DENSITY" [mm] "TSQFP50P700X700X120-32M"
  oval 1.6x0.3 smd mask-0.035: 1(-3.1,1.75) 2(-3.1,1.25) 3(-3.1,0.75) 4(-3.1,0.25) 5(-3.1,-0.25) 6(-3.1,-0.75) 7(-3.1,-1.25) 8(-3.1,-1.75) 17(3.1,-1.75) 18(3.1,-1.25) 19(3.1,-0.75) 20(3.1,-0.25) 21(3.1,0.25) 22(3.1,0.75) 23(3.1,1.25) 24(3.1,1.75)
  oval 0.3x1.6 smd mask-0.035: 9(-1.75,-3.1) 10(-1.25,-3.1) 11(-0.75,-3.1) 12(-0.25,-3.1) 13(0.25,-3.1) 14(0.75,-3.1) 15(1.25,-3.1) 16(1.75,-3.1) 25(1.75,3.1) 26(1.25,3.1) 27(0.75,3.1) 28(0.25,3.1) 29(-0.25,3.1) 30(-0.75,3.1) 31(-1.25,3.1) 32(-1.75,3.1)
  silkscreen extent -3.22,0.8 -0.8,2.57, body extent -3.5,-3.5 3.5,3.5, height 1.2
118-A-5/2D [mm]
  round 1 hole 0.6: 1(0,0) 2(1.52,0) 3(4.06,0) 4(6.6,0)
  silkscreen extent -1.78,-2.79 7.75,2.79, body extent -0.76,-2.4 7.37,2.4, height 14.73
"CAP 0603 IPC MID DENSITY" [mm]
  rrect25% 1.1x1 smd: 1(-0.85,0) 2(0.85,0)
  silkscreen extent -0.15,-0.7 0.15,0.7, body extent -0.8,-0.4 0.8,0.4, height 0.3
"CAP 0603 IPC MID DENSITY MURATA" [mm]
  rect 1.105x1.006 smd paste+0 mask+0: 1(-0.701,0) 2(0.701,0)
  body extent -1.5,-0.75 1.5,0.75, height 0.25
"CAP 0603 NON-IPC KEMET X7R" [mm]
  rect 0.75x0.9 smd paste+0 mask+0: 1(-0.6,0) 2(0.6,0)
  body extent -1.2,-0.6 1.2,0.6, height 0.25
"CAP 0805 NON-IPC KEMET X5R" [mm]
  rect 0.95x1.35 smd paste+0 mask+0: 1(-0.75,0) 2(0.75,0)
  silkscreen extent -1.1,-1.05 1.1,1.05, body extent -1,-0.63 1,0.63, height 1.4
"CAP 1206 IPC LOW DENSITY" [mm]
  rrect25% 1.1x1.6 smd: 1(-1.55,0) 2(1.55,0)
  silkscreen extent -2.67,-1.17 2.67,1.17, body extent -1.7,-0.9 1.7,0.9, height 1.8
"CAP 1206 NON-IPC KEMET NP0" [mm]
  rect 0.95x1.7 smd paste+0 mask+0: 1(-1.4,0) 2(1.4,0)
  body extent -1.6,-0.8 1.6,0.8, height 0.88
"CAP 1206 UNKNOWN" [mm] "Ceramic Capacitors, body 3.2x1.6mm, WCAP-CSGP_1206_L3.2W1.6H0.8"
  rect 0.9x1.6 smd: 1(-1.55,0) 2(1.55,0)
  body extent -1.6,-0.8 1.6,0.8, height 0.8
"COAX MMCX SMD" [mm] "50Ohm, female jack"
  round 0.89 smd: 1(0,0)
  rrect25% 1.15x1.15 smd: 2(-1.425,-1.425) 2(-1.425,1.425) 2(1.425,-1.425) 2(1.425,1.425)
  silkscreen extent -1.91,-1.91 1.91,1.91, body extent -1.73,-1.73 1.73,1.73, height 5
"COAX MMCX THT" [mm] "50Ohm, 6GHz max, female jack, Wurth Elektronik 66012002111503"
  round 1.3 hole 0.8: 1(0,0) 2(-1.27,1.27) 3(1.27,1.27) 4(1.27,-1.27) 5(-1.27,-1.27)
  silkscreen extent -1.75,-1.75 1.75,1.75, body extent -1.75,-1.75 1.75,1.75, height 4.5
"COAX SMA THT" [mm] "50Ohm, 18GHz max, female jack, Wurth Elektronik 60312002114503"
  round 2.325 hole 1.55: 1(0,0)
  round 2.625 hole 1.75: 2(-2.54,-2.54) 3(-2.54,2.54) 4(2.54,-2.54) 5(2.54,2.54)
  silkscreen extent -1.2,-3.5 1.2,3.5, body extent -3.5,-3.5 3.5,3.5, height 10.19
"HEADER FEMALE 10X2 1.27MM PITCH SMD" [mil]
  rect 29x58 smd: 01(225,-63.5) 02(225,63.5) 03(175,-63.5) 04(175,63.5) 05(125,-63.5) 06(125,63.5) 07(75,-63.5) 08(75,63.5) 09(25,-63.5) 10(25,63.5) 11(-25,-63.5) 12(-25,63.5) 13(-75,-63.5) 14(-75,63.5) 15(-125,-63.5) 16(-125,63.5) 17(-175,-63.5) 18(-175,63.5) 19(-225,-63.5) 20(-225,63.5)
  silkscreen extent -258,-122 259,60, body extent -258,-85 259,85, height 94
"HEADER MALE 4x1 2MM PITCH THT" [mm]
  rect 1.35x1.35 hole 0.9: 1(0,0)
  round 1.35 hole 0.9: 2(-2,0) 3(-4,0) 4(-6,0)
  silkscreen extent -8.3,-1.95 2,3.05, body extent -7.95,-1.6 2.05,3.1, height 6.05
"HEADER MALE 20x1 1MM PITCH SMD" [mm]
  rect 0.55x1.7 smd: 1(-9.675,-1.35) 2(-8.675,-1.35) 3(-7.675,-1.35) 4(-6.675,-1.35) 5(-5.675,-1.35) 6(-4.675,-1.35) 7(-3.675,-1.35) 8(-2.675,-1.35) 9(-1.675,-1.35) 10(-0.675,-1.35) 11(0.325,-1.35) 12(1.325,-1.35) 13(2.325,-1.35) 14(3.325,-1.35) 15(4.325,-1.35) 16(5.325,-1.35) 17(6.325,-1.35) 18(7.325,-1.35) 19(8.325,-1.35) 20(9.325,-1.35)
  rect 1.5x1.45 smd: MP1(-11.225,-1.455) MP2(11.225,-1.455) MP3(-11.225,1.455) MP5(11.225,1.455)
  rect 2.5x0.65 smd: MP4(0,0.975)
  silkscreen extent -10.13,0.78 10.13,0.78, body extent -11.95,-1.91 11.95,1.89, height 5.22
"IND 1210 IPC LOW DENSITY" [mm] "Taiyo Yuden branding on 3D body"
  rect 1.654x2.806 smd paste+0 mask+0: 1(-1.426,0) 2(1.426,0)
  silkscreen extent -0.25,-1.4 0.25,1.4, body extent -1.6,-1.25 1.6,1.25, height 2.7
"JUMPER 2POS 1MM PITCH THT" [mm] "GCT BC020-02-A-0200-0300-L-G"
  round 0.8 hole 0.5: 1(0,0) 2(1,0)
  body extent -0.5,-0.64 1.5,0.64, height 3
"JUMPER 2POS 2.54MM PITCH THT" [mm]
  rect 1.7x1.7 hole 1: 1(0,0)
  round 1.7 hole 1: 2(2.54,0)
  silkscreen extent -1.52,-1.52 4.06,1.52, body extent -1.27,-1.27 3.81,1.27, height 8.38
"JUMPER 3POS 1MM PITCH THT" [mm] "GCT BC020-03-A-0200-0300-L-G"
  round 0.75 hole 0.5: 1(-1,0) 2(0,0) 3(1,0)
  body extent -1.5,-0.64 1.5,0.64, height 4.3
"LED 0603 MID DENSITY" [mm]
  rrect25% 1x1 smd: 1(0.8,0) 2(-0.8,0)
  silkscreen extent 1.46,-0.76 1.56,-0.66, body extent -0.8,-0.4 0.8,0.4, height 0.7
"M3 PTH FOR 4.5MM HEX" [mm] "M3 plated through hole; oversized for 4.5mm hex standoffs"
  round 6.5 hole 3.5: 1(0,0)
"POGO PINS 2x2 SMD 50mil pitch" [mm] "Mill-Max 855-22-004-30-004101"
  round 0.94 smd: 1(-0.635,-0.635) 2(-0.635,0.635) 3(0.635,-0.635) 4(0.635,0.635)
  silkscreen extent -1.46,-1.53 1.21,1.53, body extent -1.46,-1.52 1.46,1.52, height 4.2
"POGO_PAD 3 x 1x2" [mil] "Pad corresponding to array of three 1x2 pin components. TODO: Check if the pogo pins have been fit-tested. The solder layer polygon on Sgt seems too narrow."
  round 1 smd far side: 1(0,0) 2(-98.43,0) 3(98.43,0)
  Bottom Layer region: -29.04,-57.09 -29.04,57.09 29.04,57.09 29.04,-57.09
  Bottom Layer region: -107.28,-57.09 -107.28,57.09 -41.34,57.09 -41.34,-57.09
  Bottom Layer region: 107.28,57.09 107.28,-57.09 41.34,-57.09 41.34,57.09
"RES 0402 IPC LOW DENSITY" [mm]
  rect 0.7x0.65 smd: 1(-0.475,0) 2(0.475,0)
  body extent -0.53,-0.27 0.53,0.28, height 0.4
"RES 0402 IPC LOW DENSITY YAGEO" [mm]
  rect 0.715x0.672 smd paste+0 mask+0: 1(-0.479,0) 2(0.479,0)
  silkscreen extent -0.84,-0.74 0.84,0.74, body extent -0.5,-0.25 0.5,0.25, height 0.4
"RES 0402 IPC MID DENSITY" [mm] "Chip Resistor, 2-Leads, Body 1.00x0.50mm, IPC Medium Density"
  rect 0.6x0.55 smd: 1(-0.425,0) 2(0.425,0)
  body extent -0.53,-0.27 0.53,0.28, height 0.4
"RES 0402 NON-IPC SEI" [mm]
  rect 0.5x0.6 smd paste+0 mask+0: 1(-0.5,0) 2(0.5,0)
  body extent -0.5,-0.25 0.5,0.25, height 0.4
"RES 0402 NON-IPC YAGEO" [mm]
  rect 0.5x0.6 smd paste+0 mask+0: 1(-0.5,0) 2(0.5,0)
  body extent -0.85,-0.4 0.85,0.4, height 0.25
"RES 0603 IPC MID DENSITY" [mm]
  rrect25% 1.1x1 smd: 1(-0.85,0) 2(0.85,0)
  silkscreen extent -0.15,-0.7 0.15,0.7, body extent -0.77,-0.43 0.78,0.43, height 0.44
"RES 0805 IPC HIGH DENSITY" [mm] "Chip Resistor, 2-Leads, Body 2.00x1.25mm, IPC High Density"
  rect 1x1.35 smd: 1(-0.75,0) 2(0.75,0)
  body extent -1.1,-0.72 1.1,0.72, height 0.6
"RES 1206 IPC MID DENSITY" [mm] "Chip Resistor, 2-Leads, Body 3.13x1.55mm, IPC Medium Density"
  rect 1.2x1.65 smd: 1(-1.4,0) 2(1.4,0)
  body extent -1.6,-0.8 1.6,0.8, height 0.6
"RES 1206 NON-IPC VISHAY" [mm]
  rect 1.15x1.75 smd paste+0 mask+0: 1(-1.325,0) 2(1.325,0)
  silkscreen extent -0.38,-0.87 0.38,0.87, body extent -1.6,-0.8 1.6,0.8, height 0.65
"SOD-123 ONSEMI SMALL PADS" [mm]
  rect 0.808x0.742 smd paste+0 mask+0: 1(-1.68,0)
  rrect100% 0.808x0.742 smd paste+0 mask+0: 2(1.68,0)
  silkscreen extent -2.07,-0.8 1.35,1, body extent -1.84,-0.8 1.84,0.8, height 1.35
"SOT23-5 HIGH DENSITY AD" [mm] "FP-UJ-5-IPC_C"
  rect 1.254x0.532 smd paste+0 mask+0: 1(-1.05,0.95)
  rrect100% 1.254x0.532 smd paste+0 mask+0: 2(-1.05,0) 3(-1.05,-0.95) 4(1.05,-0.95) 5(1.05,0.95)
  silkscreen extent -1.4,-1.7 1.4,1.75, body extent -1.4,-1.45 1.4,1.45, height 1
"SOT23-5 MID DENSITY" [mm] "SOT23, 5-Leads, Body 3.05x1.75mm, Pitch 0.95mm, IPC Medium Density"
  rrect17% 1x0.6 smd: 1(-1.375,0.95) 2(-1.375,0) 3(-1.375,-0.95) 4(1.375,-0.95) 5(1.375,0.95)
  silkscreen extent -1.5,-1.55 0.5,1.92, body extent -1.42,-1.46 1.42,1.46, height 1.08
"SOT23-5 NON-IPC TI" [mil] "SOT-23-5_DBV_TEX"
  rect 38.5x20 smd paste+0 mask+0: 1(-53.75,37.4) 2(-53.75,0) 3(-53.75,-37.4) 4(53.75,-37.4) 5(53.75,37.4)
  silkscreen extent -40,-65 40,65, body extent -59,-60 59,60, height 43
"SOT90-3 LOW DENSITY" [mm] "SOT90P240X110-3M"
  rrect25% 1.15x0.65 smd: 1(-1.275,0.9) 2(-1.275,-0.9) 3(1.275,0)
  silkscreen extent -2.18,-1.83 2.16,1.8, body extent -1.25,-1.5 1.25,1.5, height 1.1
"SOT353-5 NON-IPC CUSTOM" [mm] "SC70 5-pin"
  rect 0.85x0.35 smd mask+0.05: 1(-1.1,0.65) 2(-1.1,0) 3(-1.1,-0.65) 4(1.1,-0.65) 5(1.1,0.65)
  silkscreen extent -1.27,-1.27 0.76,1.4, body extent -1.05,-1 1.05,1, height 1
"SOT363-6 MID DENSITY" [mm] "Technically non-IPC, adapted from TI datasheet for SOTx311 chips"
  rect 0.9x0.4 smd paste+0 mask+0: 1(-1.1,0.65)
  rrect25% 0.9x0.4 smd paste+0 mask+0: 2(-1.1,0) 3(-1.1,-0.65) 4(1.1,-0.65) 5(1.1,0) 6(1.1,0.65)
  silkscreen extent -1.17,-1.22 0.7,1.32, body extent -1.05,-1 1.05,1, height 1
"TESTPOINT THT" [mm]
  round 1 hole 0.5: 1(0,0)
USB-miniB [mm]
  oval 1.1x1.7 hole 0.7: 1(1.6,1.3) 3(0,1.3) 5(-1.6,1.3)
  oval 1x1.6 hole 0.7: 2(0.8,-1.3)
  oval 0.8x1.7 hole 0.7: 4(-0.8,-1.3)
  oval 1.4x3.9 hole 0.65 slot 2.4 at 90 deg: 6(-3.65,0) 6(3.65,0)
  body extent -4.15,-2.4 4.15,2.3, height 7.9